# EAGLE board 9DOF-Razor-Panel-v23 (EAGLE 6.5.0), part 1 of 2
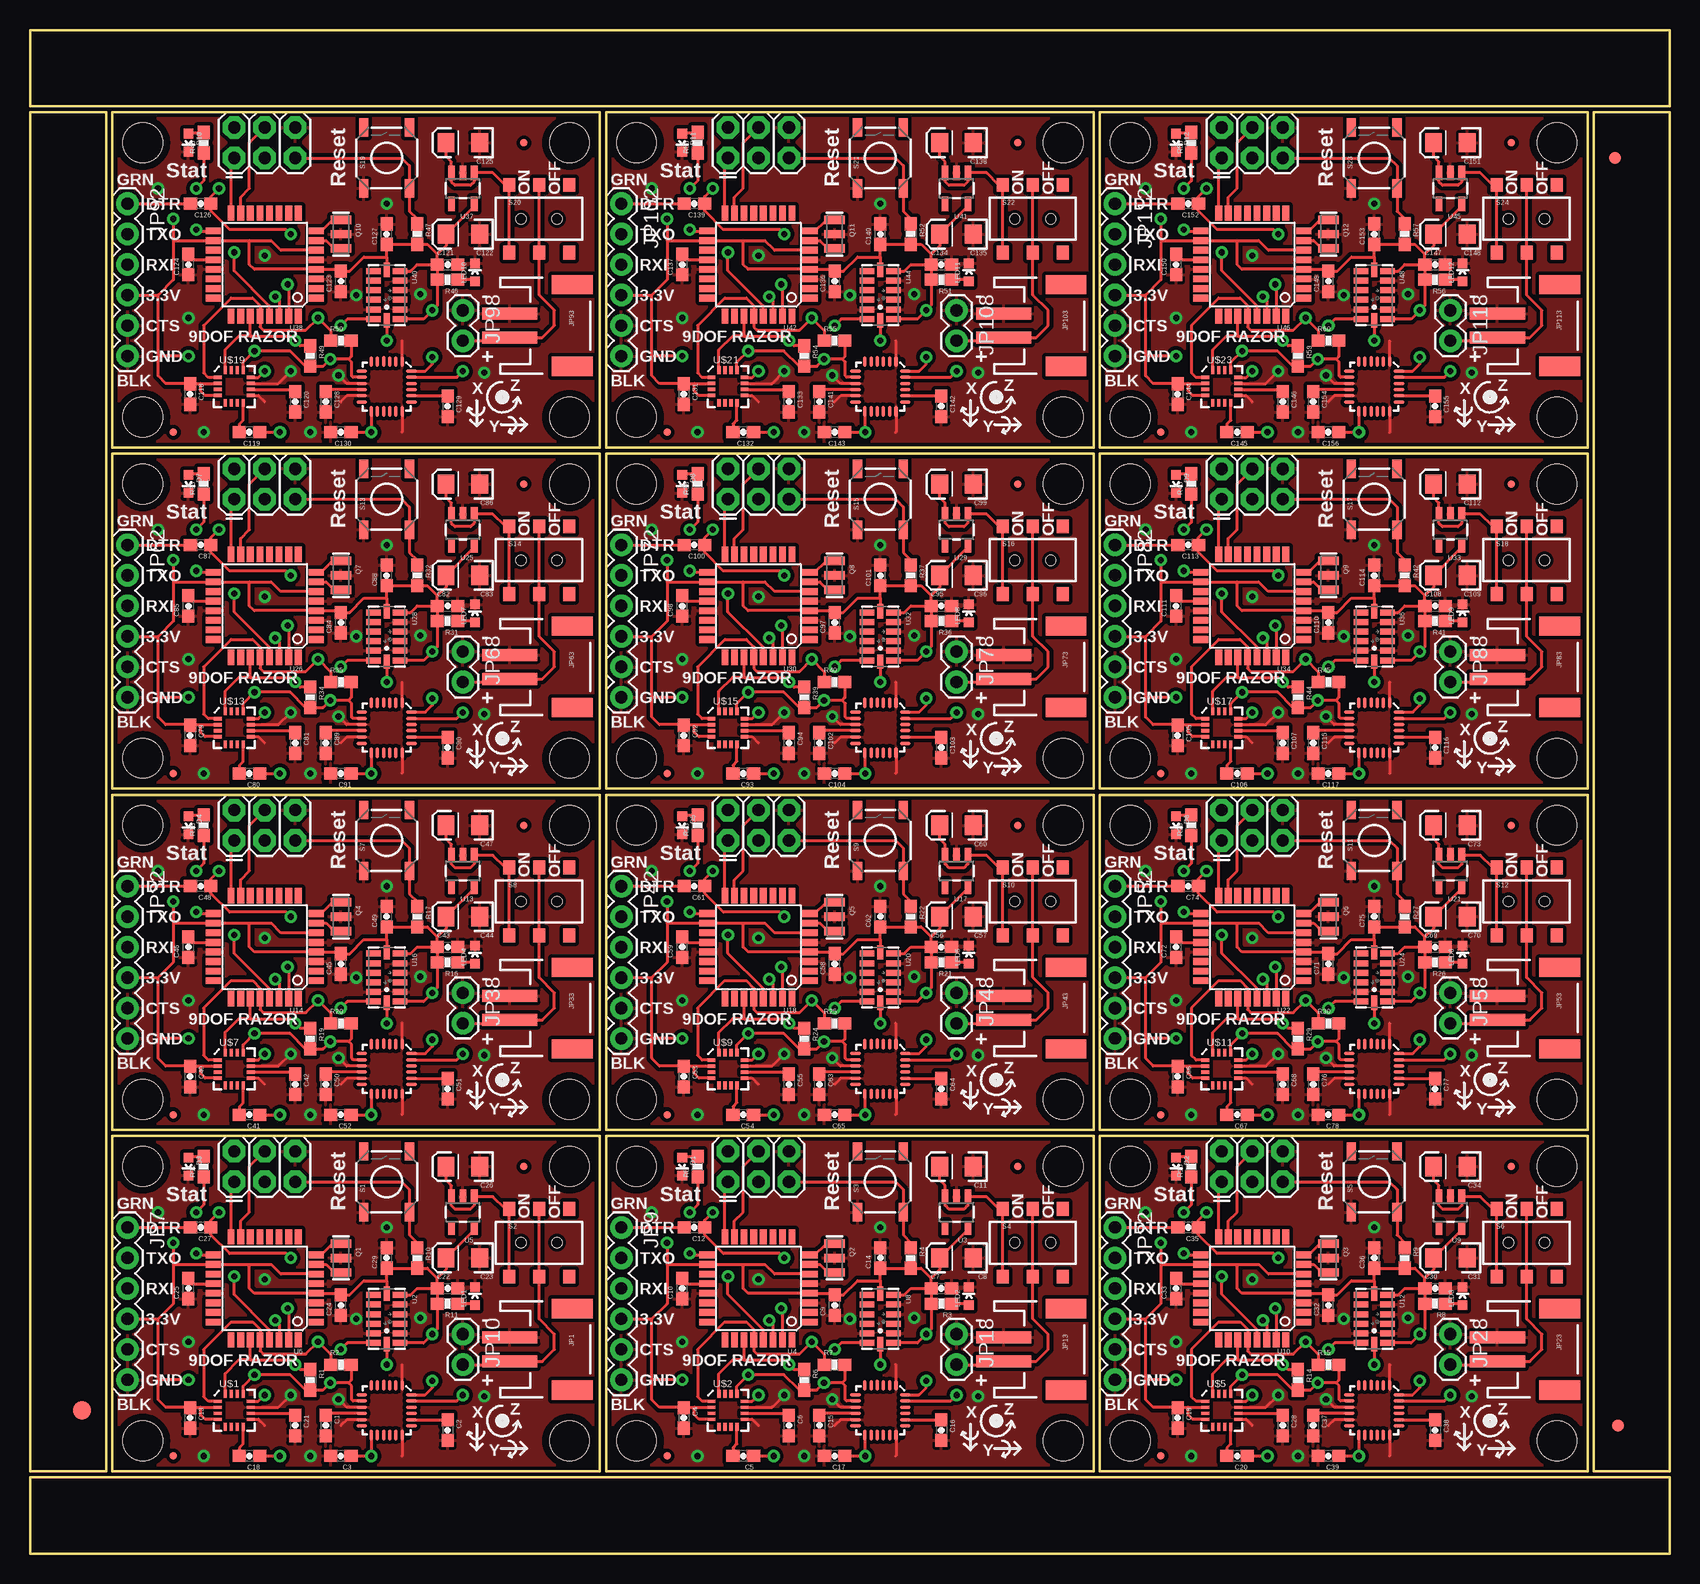
[diagram p0: board, top side]
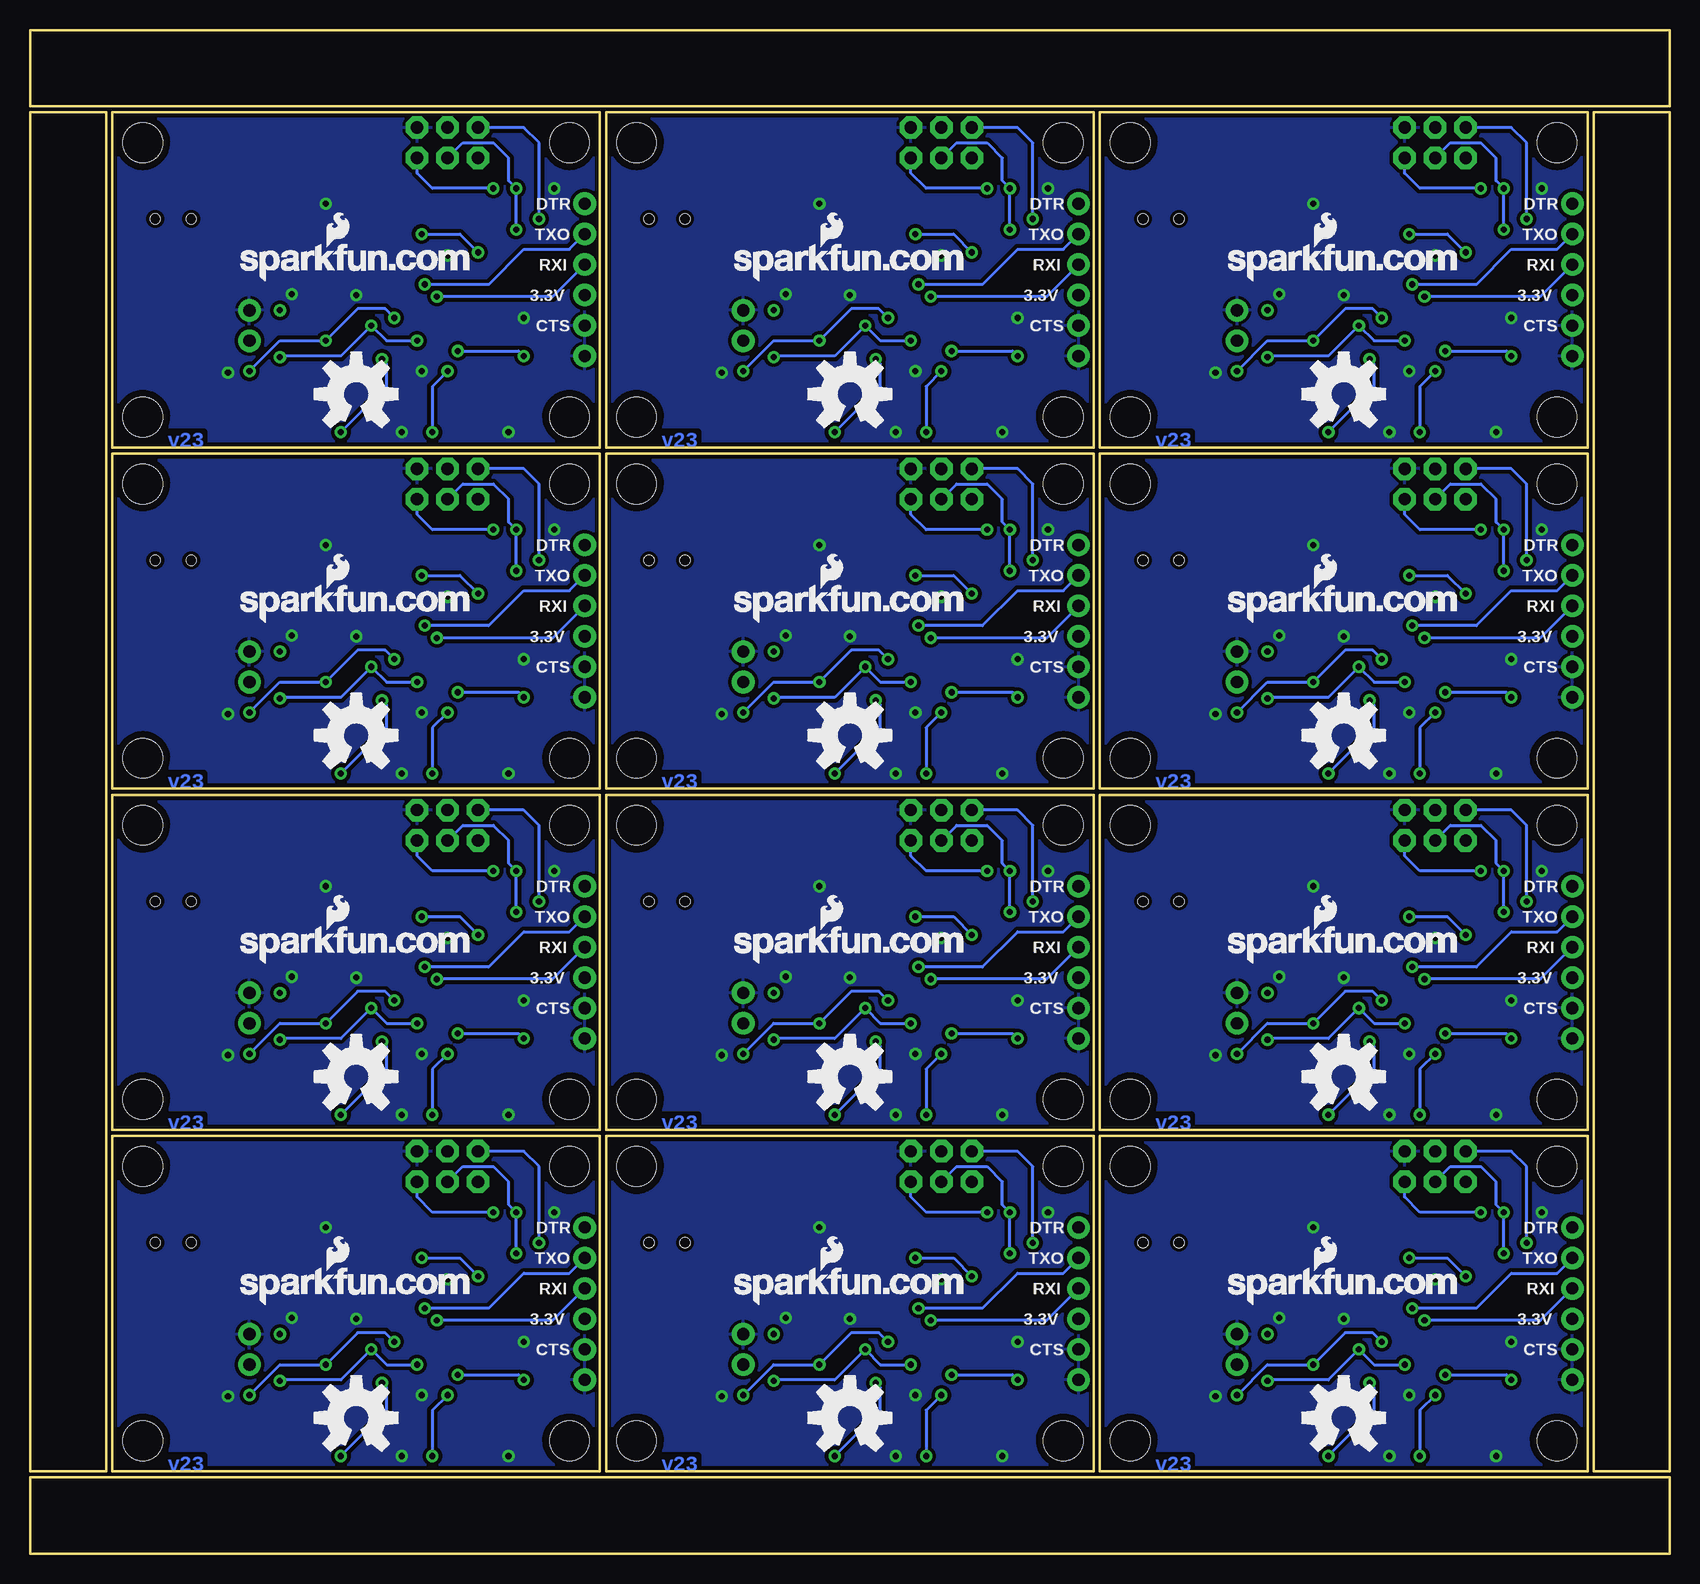
[diagram p1: board, bottom side, seen from below]

Size 136.65 x 127 mm. Coordinates in mm from the lower left corner, seen from the top.
Outline: 6.86,6.86 47.5,6.86 47.5,34.8 6.86,34.8 6.86,6.86
Outline: 48.01,6.86 88.65,6.86 88.65,34.8 48.01,34.8 48.01,6.86
Outline: 89.15,6.86 129.79,6.86 129.79,34.8 89.15,34.8 89.15,6.86
Outline: 6.86,35.31 47.5,35.31 47.5,63.25 6.86,63.25 6.86,35.31
Outline: 48.01,35.31 88.65,35.31 88.65,63.25 48.01,63.25 48.01,35.31
Outline: 89.15,35.31 129.79,35.31 129.79,63.25 89.15,63.25 89.15,35.31
Outline: 6.86,63.75 47.5,63.75 47.5,91.69 6.86,91.69 6.86,63.75
Outline: 48.01,63.75 88.65,63.75 88.65,91.69 48.01,91.69 48.01,63.75
Outline: 89.15,63.75 129.79,63.75 129.79,91.69 89.15,91.69 89.15,63.75
Outline: 6.86,92.2 47.5,92.2 47.5,120.14 6.86,120.14 6.86,92.2
Outline: 48.01,92.2 88.65,92.2 88.65,120.14 48.01,120.14 48.01,92.2
Outline: 89.15,92.2 129.79,92.2 129.79,120.14 89.15,120.14 89.15,92.2
Outline: 6.35,6.86 6.35,120.14 0,120.14 0,6.86 6.35,6.86
Outline: 0,0 136.65,0 136.65,6.35 0,6.35 0,0
Outline: 136.65,6.86 136.65,120.14 130.3,120.14 130.3,6.86 136.65,6.86
Outline: 136.65,127 0,127 0,120.65 136.65,120.65 136.65,127
Copper layers (1*16): Top 0.035mm / dielectric 1.5mm / Bottom 0.035mm
Design rules "SparkFun": minimum track width 8mil, minimum drill 20mil, track to track 8mil, track to pad 8mil, pad to pad 8mil, via to via 8mil, smd to smd 8mil, copper to edge 8mil, drill to drill 8mil, minimum pad ring 12mil, minimum via ring 10mil, stop-mask expansion 4mil, vias tented up to drill 20mil, thermal gap 10mil
Net classes: 1 vcc: width 0.254 mm
tRestrict: area 30.7,20.3 to 30.9,20.4; area 30,19.9 to 30.1,20.1; area 18.3,10.7 to 18.5,10.9; area 31.2,13.8 to 31.5,14.1; area 31.2,9.8 to 31.5,10; area 71.9,20.3 to 72,20.4; area 71.1,19.9 to 71.2,20.1; area 59.4,10.7 to 59.7,10.9; area 72.4,13.8 to 72.6,14.1; area 72.4,9.8 to 72.6,10; area 113,20.3 to 113.2,20.4; area 112.3,19.9 to 112.4,20.1; area 100.6,10.7 to 100.8,10.9; area 113.5,13.8 to 113.8,14.1; area 113.5,9.8 to 113.8,10; area 30.7,48.8 to 30.9,48.9; area 30,48.4 to 30.1,48.5; area 18.3,39.1 to 18.5,39.4; area 31.2,42.3 to 31.5,42.5; area 31.2,38.2 to 31.5,38.5; area 71.9,48.8 to 72,48.9; area 71.1,48.4 to 71.2,48.5; area 59.4,39.1 to 59.7,39.4; area 72.4,42.3 to 72.6,42.5; area 72.4,38.2 to 72.6,38.5; area 113,48.8 to 113.2,48.9; area 112.3,48.4 to 112.4,48.5; area 100.6,39.1 to 100.8,39.4; area 113.5,42.3 to 113.8,42.5; area 113.5,38.2 to 113.8,38.5; area 30.7,77.2 to 30.9,77.3; area 30,76.8 to 30.1,77; area 18.3,67.6 to 18.5,67.8; area 31.2,70.7 to 31.5,71; area 31.2,66.7 to 31.5,66.9; area 71.9,77.2 to 72,77.3; area 71.1,76.8 to 71.2,77; area 59.4,67.6 to 59.7,67.8; area 72.4,70.7 to 72.6,71; area 72.4,66.7 to 72.6,66.9; area 113,77.2 to 113.2,77.3; area 112.3,76.8 to 112.4,77; area 100.6,67.6 to 100.8,67.8; area 113.5,70.7 to 113.8,71; area 113.5,66.7 to 113.8,66.9; area 30.7,105.7 to 30.9,105.8; area 30,105.3 to 30.1,105.4; area 18.3,96 to 18.5,96.3; area 31.2,99.2 to 31.5,99.4; area 31.2,95.1 to 31.5,95.4; area 71.9,105.7 to 72,105.8; area 71.1,105.3 to 71.2,105.4; area 59.4,96 to 59.7,96.3; area 72.4,99.2 to 72.6,99.4; area 72.4,95.1 to 72.6,95.4; area 113,105.7 to 113.2,105.8; area 112.3,105.3 to 112.4,105.4; area 100.6,96 to 100.8,96.3; area 113.5,99.2 to 113.8,99.4; area 113.5,95.1 to 113.8,95.4

## Footprints (pad centres in the part's own frame; a part is rotated, then mirrored left to right if it is on the bottom)
0603-CAP = smd 1.1 x 1: 1 -0.85,0; 2 0.85,0
EIA3216 = smd 1.4 x 1.6: A 1.4,0; C -1.4,0
LED-0603 = smd 0.8 x 0.8: A 0,-0.75; C 0,0.75
FIDUCIAL-1.5X3 = smd 1.5 x 1.5: 1 0,0
FIDUCIAL-1X2 = smd 1 x 1: 1 0,0
2X3 = drill 1.016 pad 1.88 octagon: 1 0,0; 2 0,2.54; 3 2.54,0; 4 2.54,2.54; 5 5.08,0; 6 5.08,2.54
JST-2-SMD = smd 1 x 4.6: 1 -1,-3.7; 2 1,-3.7 | smd 1.6 x 3.4: NC1 -3.4,1.5; NC2 3.4,1.5
STAND-OFF = hole 3.302: 0,0
1X06 = drill 1.016 pad 1.88: 1 0,0; 2 2.54,0; 3 5.08,0; 4 7.62,0; 5 10.16,0; 6 12.7,0
1X02 = drill 1.016 pad 1.88: 1 0,0; 2 2.54,0
FIDUCIAL-1X2.5 = smd 0.635 x 0.635: 1 0,0
RESONATOR-SMD = smd 0.7 x 1.7: 1 -1.2,0; 2 0,0; 3 1.2,0
0603-RES = smd 1.1 x 1: 1 -0.85,0; 2 0.85,0
TACTILE_SWITCH_SMD = smd 1.524 x 0.762: 1 -2.54,1.905; 2 2.54,1.905; 3 -2.54,-1.905; 4 2.54,-1.905
AYZ0202 = smd 1 x 1.15: 1 -2.5,2.825; 2 0,2.825; 3 2.5,2.825; 4 -2.5,-2.825; 5 0,-2.825; 6 2.5,-2.825 | hole 0.85: 1.5,0; -1.5,0
QFN-24_ITG3200_1:1 = smd 0.889 x 0.279: 1 -2.076,1.301; 2 -2.076,0.775; 3 -2.076,0.25; 4 -2.102,-0.25; 5 -2.076,-0.775; 6 -2.076,-1.301; 13 2.076,-1.301; 14 2.076,-0.775; 15 2.076,-0.25; 16 2.076,0.25; 17 2.076,0.775; 18 2.076,1.301 | smd 0.279 x 0.889: 7 -1.301,-2.076; 8 -0.775,-2.076; 9 -0.25,-2.076; 10 0.25,-2.076; 11 0.775,-2.076; 12 1.301,-2.076; 19 1.301,2.076; 20 0.775,2.076; 21 0.25,2.076; 22 -0.25,2.076; 23 -0.775,2.076; 24 -1.301,2.076
LGA14 = smd 0.5 x 1.2: 1 2,1.1; 2 1.2,1.1; 3 0.4,1.1; 4 -0.4,1.1; 5 -1.2,1.1; 6 -2,1.1; 8 -2,-1.1; 9 -1.2,-1.1; 10 -0.4,-1.1; 11 0.4,-1.1; 12 1.2,-1.1; 13 2,-1.1 | smd 1.2 x 0.5: 7 -2.1,0; 14 2.1,0
SOT23-5 = smd 0.55 x 1.2: 1 -0.95,-1.3; 2 0,-1.3; 3 0.95,-1.3; 4 0.95,1.3; 5 -0.95,1.3
TQFP32-08 = smd 1.27 x 0.559: 1 -4.293,2.8; 2 -4.293,2; 3 -4.293,1.2; 4 -4.293,0.4; 5 -4.293,-0.4; 6 -4.293,-1.2; 7 -4.293,-2; 8 -4.293,-2.8; 17 4.293,-2.8; 18 4.293,-2; 19 4.293,-1.2; 20 4.293,-0.4; 21 4.293,0.4; 22 4.293,1.2; 23 4.293,2; 24 4.293,2.8 | smd 0.559 x 1.27: 9 -2.8,-4.293; 10 -2,-4.293; 11 -1.2,-4.293; 12 -0.4,-4.293; 13 0.4,-4.293; 14 1.2,-4.293; 15 2,-4.293; 16 2.8,-4.293; 25 2.8,4.293; 26 2,4.293; 27 1.2,4.293; 28 0.4,4.293; 29 -0.4,4.293; 30 -1.2,4.293; 31 -2,4.293; 32 -2.8,4.293
16LPCC = smd 0.65 x 0.28: 1 -1.37,0.75; 2 -1.37,0.25; 3 -1.37,-0.25; 4 -1.37,-0.75; 9 1.37,-0.75; 10 1.37,-0.25; 11 1.37,0.25; 12 1.37,0.75 | smd 0.28 x 0.65: 5 -0.75,-1.37; 6 -0.25,-1.37; 7 0.25,-1.37; 8 0.75,-1.37; 13 0.75,1.37; 14 0.25,1.37; 15 -0.25,1.37; 16 -0.75,1.37

## Placement (x,y rotation side)
C1  0.1uF  [0603-CAP]  24.64,10.67 270 top
C2  2.2nF  [0603-CAP]  34.8,10.29 270 top
C3  10nF  [0603-CAP]  25.91,8.13 180 top
C4  0.1uF  [0603-CAP]  54.48,11.3 270 top
C5  0.22uF  [0603-CAP]  59.44,8.13 180 top
C6  4.7uF  [0603-CAP]  63.25,10.67 270 top
C7  0.1uF  [0603-CAP]  75.95,22.1 0 top
C8  10uF  [EIA3216]  77.22,24.64 180 top
C9  0.1uF  [0603-CAP]  67.06,20.7 90 top
C10  0.1uF  [0603-CAP]  54.36,22.1 90 top
C11  10uF  [EIA3216]  77.22,32.26 180 top
C12  0.1uF  [0603-CAP]  55.37,27.18 180 top
C13  0.1uF  [0603-CAP]  13.34,11.3 270 top
C14  0.1uF  [0603-CAP]  70.87,24.64 90 top
C15  0.1uF  [0603-CAP]  65.79,10.67 270 top
C16  2.2nF  [0603-CAP]  75.95,10.29 270 top
C17  10nF  [0603-CAP]  67.06,8.13 180 top
C18  0.22uF  [0603-CAP]  18.29,8.13 180 top
C19  0.1uF  [0603-CAP]  95.63,11.3 270 top
C20  0.22uF  [0603-CAP]  100.58,8.13 180 top
C21  4.7uF  [0603-CAP]  22.1,10.67 270 top
C22  0.1uF  [0603-CAP]  34.8,22.1 0 top
C23  10uF  [EIA3216]  36.07,24.64 180 top
C24  0.1uF  [0603-CAP]  25.91,20.7 90 top
C25  0.1uF  [0603-CAP]  13.21,22.1 90 top
C26  10uF  [EIA3216]  36.07,32.26 180 top
C27  0.1uF  [0603-CAP]  14.22,27.18 180 top
C28  4.7uF  [0603-CAP]  104.39,10.67 270 top
C29  0.1uF  [0603-CAP]  29.72,24.64 90 top
C30  0.1uF  [0603-CAP]  117.09,22.1 0 top
C31  10uF  [EIA3216]  118.36,24.64 180 top
C32  0.1uF  [0603-CAP]  108.2,20.7 90 top
C33  0.1uF  [0603-CAP]  95.5,22.1 90 top
C34  10uF  [EIA3216]  118.36,32.26 180 top
C35  0.1uF  [0603-CAP]  96.52,27.18 180 top
C36  0.1uF  [0603-CAP]  112.01,24.64 90 top
C37  0.1uF  [0603-CAP]  106.93,10.67 270 top
C38  2.2nF  [0603-CAP]  117.09,10.29 270 top
C39  10nF  [0603-CAP]  108.2,8.13 180 top
C40  0.1uF  [0603-CAP]  13.34,39.75 270 top
C41  0.22uF  [0603-CAP]  18.29,36.58 180 top
C42  4.7uF  [0603-CAP]  22.1,39.12 270 top
C43  0.1uF  [0603-CAP]  34.8,50.55 0 top
C44  10uF  [EIA3216]  36.07,53.09 180 top
C45  0.1uF  [0603-CAP]  25.91,49.15 90 top
C46  0.1uF  [0603-CAP]  13.21,50.55 90 top
C47  10uF  [EIA3216]  36.07,60.71 180 top
C48  0.1uF  [0603-CAP]  14.22,55.63 180 top
C49  0.1uF  [0603-CAP]  29.72,53.09 90 top
C50  0.1uF  [0603-CAP]  24.64,39.12 270 top
C51  2.2nF  [0603-CAP]  34.8,38.73 270 top
C52  10nF  [0603-CAP]  25.91,36.58 180 top
C53  0.1uF  [0603-CAP]  54.48,39.75 270 top
C54  0.22uF  [0603-CAP]  59.44,36.58 180 top
C55  4.7uF  [0603-CAP]  63.25,39.12 270 top
C56  0.1uF  [0603-CAP]  75.95,50.55 0 top
C57  10uF  [EIA3216]  77.22,53.09 180 top
C58  0.1uF  [0603-CAP]  67.06,49.15 90 top
C59  0.1uF  [0603-CAP]  54.36,50.55 90 top
C60  10uF  [EIA3216]  77.22,60.71 180 top
C61  0.1uF  [0603-CAP]  55.37,55.63 180 top
C62  0.1uF  [0603-CAP]  70.87,53.09 90 top
C63  0.1uF  [0603-CAP]  65.79,39.12 270 top
C64  2.2nF  [0603-CAP]  75.95,38.73 270 top
C65  10nF  [0603-CAP]  67.06,36.58 180 top
C66  0.1uF  [0603-CAP]  95.63,39.75 270 top
C67  0.22uF  [0603-CAP]  100.58,36.58 180 top
C68  4.7uF  [0603-CAP]  104.39,39.12 270 top
C69  0.1uF  [0603-CAP]  117.09,50.55 0 top
C70  10uF  [EIA3216]  118.36,53.09 180 top
C71  0.1uF  [0603-CAP]  108.2,49.15 90 top
C72  0.1uF  [0603-CAP]  95.5,50.55 90 top
C73  10uF  [EIA3216]  118.36,60.71 180 top
C74  0.1uF  [0603-CAP]  96.52,55.63 180 top
C75  0.1uF  [0603-CAP]  112.01,53.09 90 top
C76  0.1uF  [0603-CAP]  106.93,39.12 270 top
C77  2.2nF  [0603-CAP]  117.09,38.73 270 top
C78  10nF  [0603-CAP]  108.2,36.58 180 top
C79  0.1uF  [0603-CAP]  13.34,68.2 270 top
C80  0.22uF  [0603-CAP]  18.29,65.02 180 top
C81  4.7uF  [0603-CAP]  22.1,67.56 270 top
C82  0.1uF  [0603-CAP]  34.8,78.99 0 top
C83  10uF  [EIA3216]  36.07,81.53 180 top
C84  0.1uF  [0603-CAP]  25.91,77.6 90 top
C85  0.1uF  [0603-CAP]  13.21,78.99 90 top
C86  10uF  [EIA3216]  36.07,89.15 180 top
C87  0.1uF  [0603-CAP]  14.22,84.07 180 top
C88  0.1uF  [0603-CAP]  29.72,81.53 90 top
C89  0.1uF  [0603-CAP]  24.64,67.56 270 top
C90  2.2nF  [0603-CAP]  34.8,67.18 270 top
C91  10nF  [0603-CAP]  25.91,65.02 180 top
C92  0.1uF  [0603-CAP]  54.48,68.2 270 top
C93  0.22uF  [0603-CAP]  59.44,65.02 180 top
C94  4.7uF  [0603-CAP]  63.25,67.56 270 top
C95  0.1uF  [0603-CAP]  75.95,78.99 0 top
C96  10uF  [EIA3216]  77.22,81.53 180 top
C97  0.1uF  [0603-CAP]  67.06,77.6 90 top
C98  0.1uF  [0603-CAP]  54.36,78.99 90 top
C99  10uF  [EIA3216]  77.22,89.15 180 top
C100  0.1uF  [0603-CAP]  55.37,84.07 180 top
C101  0.1uF  [0603-CAP]  70.87,81.53 90 top
C102  0.1uF  [0603-CAP]  65.79,67.56 270 top
C103  2.2nF  [0603-CAP]  75.95,67.18 270 top
C104  10nF  [0603-CAP]  67.06,65.02 180 top
C105  0.1uF  [0603-CAP]  95.63,68.2 270 top
C106  0.22uF  [0603-CAP]  100.58,65.02 180 top
C107  4.7uF  [0603-CAP]  104.39,67.56 270 top
C108  0.1uF  [0603-CAP]  117.09,78.99 0 top
C109  10uF  [EIA3216]  118.36,81.53 180 top
C110  0.1uF  [0603-CAP]  108.2,77.6 90 top
C111  0.1uF  [0603-CAP]  95.5,78.99 90 top
C112  10uF  [EIA3216]  118.36,89.15 180 top
C113  0.1uF  [0603-CAP]  96.52,84.07 180 top
C114  0.1uF  [0603-CAP]  112.01,81.53 90 top
C115  0.1uF  [0603-CAP]  106.93,67.56 270 top
C116  2.2nF  [0603-CAP]  117.09,67.18 270 top
C117  10nF  [0603-CAP]  108.2,65.02 180 top
C118  0.1uF  [0603-CAP]  13.34,96.65 270 top
C119  0.22uF  [0603-CAP]  18.29,93.47 180 top
C120  4.7uF  [0603-CAP]  22.1,96.01 270 top
C121  0.1uF  [0603-CAP]  34.8,107.44 0 top
C122  10uF  [EIA3216]  36.07,109.98 180 top
C123  0.1uF  [0603-CAP]  25.91,106.05 90 top
C124  0.1uF  [0603-CAP]  13.21,107.44 90 top
C125  10uF  [EIA3216]  36.07,117.6 180 top
C126  0.1uF  [0603-CAP]  14.22,112.52 180 top
C127  0.1uF  [0603-CAP]  29.72,109.98 90 top
C128  0.1uF  [0603-CAP]  24.64,96.01 270 top
C129  2.2nF  [0603-CAP]  34.8,95.63 270 top
C130  10nF  [0603-CAP]  25.91,93.47 180 top
C131  0.1uF  [0603-CAP]  54.48,96.65 270 top
C132  0.22uF  [0603-CAP]  59.44,93.47 180 top
C133  4.7uF  [0603-CAP]  63.25,96.01 270 top
C134  0.1uF  [0603-CAP]  75.95,107.44 0 top
C135  10uF  [EIA3216]  77.22,109.98 180 top
C136  0.1uF  [0603-CAP]  67.06,106.05 90 top
C137  0.1uF  [0603-CAP]  54.36,107.44 90 top
C138  10uF  [EIA3216]  77.22,117.6 180 top
C139  0.1uF  [0603-CAP]  55.37,112.52 180 top
C140  0.1uF  [0603-CAP]  70.87,109.98 90 top
C141  0.1uF  [0603-CAP]  65.79,96.01 270 top
C142  2.2nF  [0603-CAP]  75.95,95.63 270 top
C143  10nF  [0603-CAP]  67.06,93.47 180 top
C144  0.1uF  [0603-CAP]  95.63,96.65 270 top
C145  0.22uF  [0603-CAP]  100.58,93.47 180 top
C146  4.7uF  [0603-CAP]  104.39,96.01 270 top
C147  0.1uF  [0603-CAP]  117.09,107.44 0 top
C148  10uF  [EIA3216]  118.36,109.98 180 top
C149  0.1uF  [0603-CAP]  108.2,106.05 90 top
C150  0.1uF  [0603-CAP]  95.5,107.44 90 top
C151  10uF  [EIA3216]  118.36,117.6 180 top
C152  0.1uF  [0603-CAP]  96.52,112.52 180 top
C153  0.1uF  [0603-CAP]  112.01,109.98 90 top
C154  0.1uF  [0603-CAP]  106.93,96.01 270 top
C155  2.2nF  [0603-CAP]  117.09,95.63 270 top
C156  10nF  [0603-CAP]  108.2,93.47 180 top
D1  Green  [LED-0603]  54.36,32.26 180 top
D2  Green  [LED-0603]  95.5,32.26 180 top
D3  Green  [LED-0603]  13.21,32.26 180 top
D4  Green  [LED-0603]  13.21,60.71 180 top
D5  Green  [LED-0603]  54.36,60.71 180 top
D6  Green  [LED-0603]  95.5,60.71 180 top
D7  Green  [LED-0603]  13.21,89.15 180 top
D8  Green  [LED-0603]  54.36,89.15 180 top
D9  Green  [LED-0603]  95.5,89.15 180 top
D10  Green  [LED-0603]  13.21,117.6 180 top
D11  Green  [LED-0603]  54.36,117.6 180 top
D12  Green  [LED-0603]  95.5,117.6 180 top
E$1  [FIDUCIAL-1.5X3]  4.32,11.94 0 top
E$4  [FIDUCIAL-1X2]  132.33,10.67 0 top
E$5  [FIDUCIAL-1X2]  132.08,116.33 180 top
J1  AVR_SPI_PRG_6PTH  [2X3]  17.02,30.99 0 top
J2  AVR_SPI_PRG_6PTH  [2X3]  58.17,30.99 0 top
J3  AVR_SPI_PRG_6PTH  [2X3]  99.31,30.99 0 top
J4  AVR_SPI_PRG_6PTH  [2X3]  17.02,59.44 0 top
J5  AVR_SPI_PRG_6PTH  [2X3]  58.17,59.44 0 top
J6  AVR_SPI_PRG_6PTH  [2X3]  99.31,59.44 0 top
J7  AVR_SPI_PRG_6PTH  [2X3]  17.02,87.88 0 top
J8  AVR_SPI_PRG_6PTH  [2X3]  58.17,87.88 0 top
J9  AVR_SPI_PRG_6PTH  [2X3]  99.31,87.88 0 top
J10  AVR_SPI_PRG_6PTH  [2X3]  17.02,116.33 0 top
J11  AVR_SPI_PRG_6PTH  [2X3]  58.17,116.33 0 top
J12  AVR_SPI_PRG_6PTH  [2X3]  99.31,116.33 0 top
JP1  JST_Horizontal  [JST-2-SMD]  43.69,17.02 270 top
JP2  STAND-OFF  [STAND-OFF]  9.4,32.26 90 top
JP3  LOGO-SFENEW  [SFE-NEW-WEBLOGO]  36.83,20.7 0 bottom
JP4  STAND-OFF  [STAND-OFF]  9.4,9.4 90 top
JP5  STAND-OFF  [STAND-OFF]  44.96,32.26 90 top
JP6  STAND-OFF  [STAND-OFF]  44.96,9.4 90 top
JP7  FTDI Basic  [1X06]  8.13,27.18 270 top
JP8  LOGO-SFENEW  [SFE-NEW-WEBLOGO]  77.98,20.7 0 bottom
JP9  FTDI Basic  [1X06]  49.28,27.18 270 top
JP10  JST_Horizontal  [1X02]  36.07,18.29 270 top
JP11  FIDUCIAL1X2.5  [FIDUCIAL-1X2.5]  41.15,32.26 0 top
JP12  FIDUCIAL1X2.5  [FIDUCIAL-1X2.5]  11.94,8.13 0 top
JP13  JST_Horizontal  [JST-2-SMD]  84.84,17.02 270 top
JP14  STAND-OFF  [STAND-OFF]  50.55,32.26 90 top
JP15  STAND-OFF  [STAND-OFF]  50.55,9.4 90 top
JP16  STAND-OFF  [STAND-OFF]  86.11,32.26 90 top
JP17  STAND-OFF  [STAND-OFF]  86.11,9.4 90 top
JP18  JST_Horizontal  [1X02]  77.22,18.29 270 top
JP19  FIDUCIAL1X2.5  [FIDUCIAL-1X2.5]  82.3,32.26 0 top
JP20  FIDUCIAL1X2.5  [FIDUCIAL-1X2.5]  53.09,8.13 0 top
JP21  LOGO-SFENEW  [SFE-NEW-WEBLOGO]  119.13,20.7 0 bottom
JP22  FTDI Basic  [1X06]  90.42,27.18 270 top
JP23  JST_Horizontal  [JST-2-SMD]  125.98,17.02 270 top
JP24  STAND-OFF  [STAND-OFF]  91.69,32.26 90 top
JP25  STAND-OFF  [STAND-OFF]  91.69,9.4 90 top
JP26  STAND-OFF  [STAND-OFF]  127.25,32.26 90 top
JP27  STAND-OFF  [STAND-OFF]  127.25,9.4 90 top
JP28  JST_Horizontal  [1X02]  118.36,18.29 270 top
JP29  FIDUCIAL1X2.5  [FIDUCIAL-1X2.5]  123.44,32.26 0 top
JP30  FIDUCIAL1X2.5  [FIDUCIAL-1X2.5]  94.23,8.13 0 top
JP31  LOGO-SFENEW  [SFE-NEW-WEBLOGO]  36.83,49.15 0 bottom
JP32  FTDI Basic  [1X06]  8.13,55.63 270 top
JP33  JST_Horizontal  [JST-2-SMD]  43.69,45.47 270 top
JP34  STAND-OFF  [STAND-OFF]  9.4,60.71 90 top
JP35  STAND-OFF  [STAND-OFF]  9.4,37.85 90 top
JP36  STAND-OFF  [STAND-OFF]  44.96,60.71 90 top
JP37  STAND-OFF  [STAND-OFF]  44.96,37.85 90 top
JP38  JST_Horizontal  [1X02]  36.07,46.74 270 top
JP39  FIDUCIAL1X2.5  [FIDUCIAL-1X2.5]  41.15,60.71 0 top
JP40  FIDUCIAL1X2.5  [FIDUCIAL-1X2.5]  11.94,36.58 0 top
JP41  LOGO-SFENEW  [SFE-NEW-WEBLOGO]  77.98,49.15 0 bottom
JP42  FTDI Basic  [1X06]  49.28,55.63 270 top
JP43  JST_Horizontal  [JST-2-SMD]  84.84,45.47 270 top
JP44  STAND-OFF  [STAND-OFF]  50.55,60.71 90 top
JP45  STAND-OFF  [STAND-OFF]  50.55,37.85 90 top
JP46  STAND-OFF  [STAND-OFF]  86.11,60.71 90 top
JP47  STAND-OFF  [STAND-OFF]  86.11,37.85 90 top
JP48  JST_Horizontal  [1X02]  77.22,46.74 270 top
JP49  FIDUCIAL1X2.5  [FIDUCIAL-1X2.5]  82.3,60.71 0 top
JP50  FIDUCIAL1X2.5  [FIDUCIAL-1X2.5]  53.09,36.58 0 top
JP51  LOGO-SFENEW  [SFE-NEW-WEBLOGO]  119.13,49.15 0 bottom
JP52  FTDI Basic  [1X06]  90.42,55.63 270 top
JP53  JST_Horizontal  [JST-2-SMD]  125.98,45.47 270 top
JP54  STAND-OFF  [STAND-OFF]  91.69,60.71 90 top
JP55  STAND-OFF  [STAND-OFF]  91.69,37.85 90 top
JP56  STAND-OFF  [STAND-OFF]  127.25,60.71 90 top
JP57  STAND-OFF  [STAND-OFF]  127.25,37.85 90 top
JP58  JST_Horizontal  [1X02]  118.36,46.74 270 top
JP59  FIDUCIAL1X2.5  [FIDUCIAL-1X2.5]  123.44,60.71 0 top
JP60  FIDUCIAL1X2.5  [FIDUCIAL-1X2.5]  94.23,36.58 0 top
JP61  LOGO-SFENEW  [SFE-NEW-WEBLOGO]  36.83,77.6 0 bottom
JP62  FTDI Basic  [1X06]  8.13,84.07 270 top
JP63  JST_Horizontal  [JST-2-SMD]  43.69,73.91 270 top
JP64  STAND-OFF  [STAND-OFF]  9.4,89.15 90 top
JP65  STAND-OFF  [STAND-OFF]  9.4,66.29 90 top
JP66  STAND-OFF  [STAND-OFF]  44.96,89.15 90 top
JP67  STAND-OFF  [STAND-OFF]  44.96,66.29 90 top
JP68  JST_Horizontal  [1X02]  36.07,75.18 270 top
JP69  FIDUCIAL1X2.5  [FIDUCIAL-1X2.5]  41.15,89.15 0 top
JP70  FIDUCIAL1X2.5  [FIDUCIAL-1X2.5]  11.94,65.02 0 top
JP71  LOGO-SFENEW  [SFE-NEW-WEBLOGO]  77.98,77.6 0 bottom
JP72  FTDI Basic  [1X06]  49.28,84.07 270 top
JP73  JST_Horizontal  [JST-2-SMD]  84.84,73.91 270 top
JP74  STAND-OFF  [STAND-OFF]  50.55,89.15 90 top
JP75  STAND-OFF  [STAND-OFF]  50.55,66.29 90 top
JP76  STAND-OFF  [STAND-OFF]  86.11,89.15 90 top
JP77  STAND-OFF  [STAND-OFF]  86.11,66.29 90 top
JP78  JST_Horizontal  [1X02]  77.22,75.18 270 top
JP79  FIDUCIAL1X2.5  [FIDUCIAL-1X2.5]  82.3,89.15 0 top
JP80  FIDUCIAL1X2.5  [FIDUCIAL-1X2.5]  53.09,65.02 0 top
JP81  LOGO-SFENEW  [SFE-NEW-WEBLOGO]  119.13,77.6 0 bottom
JP82  FTDI Basic  [1X06]  90.42,84.07 270 top
JP83  JST_Horizontal  [JST-2-SMD]  125.98,73.91 270 top
JP84  STAND-OFF  [STAND-OFF]  91.69,89.15 90 top
JP85  STAND-OFF  [STAND-OFF]  91.69,66.29 90 top
JP86  STAND-OFF  [STAND-OFF]  127.25,89.15 90 top
JP87  STAND-OFF  [STAND-OFF]  127.25,66.29 90 top
JP88  JST_Horizontal  [1X02]  118.36,75.18 270 top
JP89  FIDUCIAL1X2.5  [FIDUCIAL-1X2.5]  123.44,89.15 0 top
JP90  FIDUCIAL1X2.5  [FIDUCIAL-1X2.5]  94.23,65.02 0 top
JP91  LOGO-SFENEW  [SFE-NEW-WEBLOGO]  36.83,106.05 0 bottom
JP92  FTDI Basic  [1X06]  8.13,112.52 270 top
JP93  JST_Horizontal  [JST-2-SMD]  43.69,102.36 270 top
JP94  STAND-OFF  [STAND-OFF]  9.4,117.6 90 top
JP95  STAND-OFF  [STAND-OFF]  9.4,94.74 90 top
JP96  STAND-OFF  [STAND-OFF]  44.96,117.6 90 top
JP97  STAND-OFF  [STAND-OFF]  44.96,94.74 90 top
JP98  JST_Horizontal  [1X02]  36.07,103.63 270 top
JP99  FIDUCIAL1X2.5  [FIDUCIAL-1X2.5]  41.15,117.6 0 top
JP100  FIDUCIAL1X2.5  [FIDUCIAL-1X2.5]  11.94,93.47 0 top
JP101  LOGO-SFENEW  [SFE-NEW-WEBLOGO]  77.98,106.05 0 bottom
JP102  FTDI Basic  [1X06]  49.28,112.52 270 top
JP103  JST_Horizontal  [JST-2-SMD]  84.84,102.36 270 top
JP104  STAND-OFF  [STAND-OFF]  50.55,117.6 90 top
JP105  STAND-OFF  [STAND-OFF]  50.55,94.74 90 top
JP106  STAND-OFF  [STAND-OFF]  86.11,117.6 90 top
JP107  STAND-OFF  [STAND-OFF]  86.11,94.74 90 top
JP108  JST_Horizontal  [1X02]  77.22,103.63 270 top
JP109  FIDUCIAL1X2.5  [FIDUCIAL-1X2.5]  82.3,117.6 0 top
JP110  FIDUCIAL1X2.5  [FIDUCIAL-1X2.5]  53.09,93.47 0 top
JP111  LOGO-SFENEW  [SFE-NEW-WEBLOGO]  119.13,106.05 0 bottom
JP112  FTDI Basic  [1X06]  90.42,112.52 270 top
JP113  JST_Horizontal  [JST-2-SMD]  125.98,102.36 270 top
JP114  STAND-OFF  [STAND-OFF]  91.69,117.6 90 top
JP115  STAND-OFF  [STAND-OFF]  91.69,94.74 90 top
JP116  STAND-OFF  [STAND-OFF]  127.25,117.6 90 top
JP117  STAND-OFF  [STAND-OFF]  127.25,94.74 90 top
JP118  JST_Horizontal  [1X02]  118.36,103.63 270 top
JP119  FIDUCIAL1X2.5  [FIDUCIAL-1X2.5]  123.44,117.6 0 top
JP120  FIDUCIAL1X2.5  [FIDUCIAL-1X2.5]  94.23,93.47 0 top
LED1  Red  [LED-0603]  37.08,21.46 0 top
LED2  Red  [LED-0603]  78.23,21.46 0 top
LED3  Red  [LED-0603]  119.38,21.46 0 top
LED4  Red  [LED-0603]  37.08,49.91 0 top
LED5  Red  [LED-0603]  78.23,49.91 0 top
LED6  Red  [LED-0603]  119.38,49.91 0 top
LED7  Red  [LED-0603]  37.08,78.36 0 top
LED8  Red  [LED-0603]  78.23,78.36 0 top
LED9  Red  [LED-0603]  119.38,78.36 0 top
LED10  Red  [LED-0603]  37.08,106.81 0 top
LED11  Red  [LED-0603]  78.23,106.81 0 top
LED12  Red  [LED-0603]  119.38,106.81 0 top
Q1  8MHz  [RESONATOR-SMD]  25.91,24.64 270 top
Q2  8MHz  [RESONATOR-SMD]  67.06,24.64 270 top
Q3  8MHz  [RESONATOR-SMD]  108.2,24.64 270 top
Q4  8MHz  [RESONATOR-SMD]  25.91,53.09 270 top
Q5  8MHz  [RESONATOR-SMD]  67.06,53.09 270 top
Q6  8MHz  [RESONATOR-SMD]  108.2,53.09 270 top
Q7  8MHz  [RESONATOR-SMD]  25.91,81.53 270 top
Q8  8MHz  [RESONATOR-SMD]  67.06,81.53 270 top
Q9  8MHz  [RESONATOR-SMD]  108.2,81.53 270 top
Q10  8MHz  [RESONATOR-SMD]  25.91,109.98 270 top
Q11  8MHz  [RESONATOR-SMD]  67.06,109.98 270 top
Q12  8MHz  [RESONATOR-SMD]  108.2,109.98 270 top
R1  4.7k  [0603-RES]  23.37,14.48 270 top
R2  4.7K  [0603-RES]  25.91,15.75 0 top
R3  10K  [0603-RES]  75.95,20.83 180 top
R4  10K  [0603-RES]  73.41,24.64 270 top
R5  330  [0603-RES]  55.63,32.26 90 top
R6  4.7k  [0603-RES]  64.52,14.48 270 top
R7  4.7K  [0603-RES]  67.06,15.75 0 top
R8  10K  [0603-RES]  117.09,20.83 180 top
R9  10K  [0603-RES]  114.55,24.64 270 top
R10  10K  [0603-RES]  32.26,24.64 270 top
R11  10K  [0603-RES]  34.8,20.83 180 top
R12  330  [0603-RES]  14.48,32.26 90 top
R13  330  [0603-RES]  96.77,32.26 90 top
R14  4.7k  [0603-RES]  105.66,14.48 270 top
R15  4.7K  [0603-RES]  108.2,15.75 0 top
R16  10K  [0603-RES]  34.8,49.28 180 top
R17  10K  [0603-RES]  32.26,53.09 270 top
R18  330  [0603-RES]  14.48,60.71 90 top
R19  4.7k  [0603-RES]  23.37,42.93 270 top
R20  4.7K  [0603-RES]  25.91,44.2 0 top
R21  10K  [0603-RES]  75.95,49.28 180 top
R22  10K  [0603-RES]  73.41,53.09 270 top
R23  330  [0603-RES]  55.63,60.71 90 top
R24  4.7k  [0603-RES]  64.52,42.93 270 top
R25  4.7K  [0603-RES]  67.06,44.2 0 top
R26  10K  [0603-RES]  117.09,49.28 180 top
R27  10K  [0603-RES]  114.55,53.09 270 top
R28  330  [0603-RES]  96.77,60.71 90 top
R29  4.7k  [0603-RES]  105.66,42.93 270 top
R30  4.7K  [0603-RES]  108.2,44.2 0 top
R31  10K  [0603-RES]  34.8,77.72 180 top
R32  10K  [0603-RES]  32.26,81.53 270 top
R33  330  [0603-RES]  14.48,89.15 90 top
R34  4.7k  [0603-RES]  23.37,71.37 270 top
R35  4.7K  [0603-RES]  25.91,72.64 0 top
R36  10K  [0603-RES]  75.95,77.72 180 top
R37  10K  [0603-RES]  73.41,81.53 270 top
R38  330  [0603-RES]  55.63,89.15 90 top
R39  4.7k  [0603-RES]  64.52,71.37 270 top
R40  4.7K  [0603-RES]  67.06,72.64 0 top
R41  10K  [0603-RES]  117.09,77.72 180 top
R42  10K  [0603-RES]  114.55,81.53 270 top
R43  330  [0603-RES]  96.77,89.15 90 top
R44  4.7k  [0603-RES]  105.66,71.37 270 top
R45  4.7K  [0603-RES]  108.2,72.64 0 top
R46  10K  [0603-RES]  34.8,106.17 180 top
R47  10K  [0603-RES]  32.26,109.98 270 top
R48  330  [0603-RES]  14.48,117.6 90 top
R49  4.7k  [0603-RES]  23.37,99.82 270 top
R50  4.7K  [0603-RES]  25.91,101.09 0 top
R51  10K  [0603-RES]  75.95,106.17 180 top
R52  10K  [0603-RES]  73.41,109.98 270 top
R53  330  [0603-RES]  55.63,117.6 90 top
R54  4.7k  [0603-RES]  64.52,99.82 270 top
R55  4.7K  [0603-RES]  67.06,101.09 0 top
R56  10K  [0603-RES]  117.09,106.17 180 top
R57  10K  [0603-RES]  114.55,109.98 270 top
R58  330  [0603-RES]  96.77,117.6 90 top
R59  4.7k  [0603-RES]  105.66,99.82 270 top
R60  4.7K  [0603-RES]  108.2,101.09 0 top
S1  Reset  [TACTILE_SWITCH_SMD]  29.72,30.99 90 top
S2  Power  [AYZ0202]  42.42,25.91 0 top
S3  Reset  [TACTILE_SWITCH_SMD]  70.87,30.99 90 top
S4  Power  [AYZ0202]  83.57,25.91 0 top
S5  Reset  [TACTILE_SWITCH_SMD]  112.01,30.99 90 top
S6  Power  [AYZ0202]  124.71,25.91 0 top
S7  Reset  [TACTILE_SWITCH_SMD]  29.72,59.44 90 top
S8  Power  [AYZ0202]  42.42,54.36 0 top
S9  Reset  [TACTILE_SWITCH_SMD]  70.87,59.44 90 top
S10  Power  [AYZ0202]  83.57,54.36 0 top
S11  Reset  [TACTILE_SWITCH_SMD]  112.01,59.44 90 top
S12  Power  [AYZ0202]  124.71,54.36 0 top
S13  Reset  [TACTILE_SWITCH_SMD]  29.72,87.88 90 top
S14  Power  [AYZ0202]  42.42,82.8 0 top
S15  Reset  [TACTILE_SWITCH_SMD]  70.87,87.88 90 top
S16  Power  [AYZ0202]  83.57,82.8 0 top
S17  Reset  [TACTILE_SWITCH_SMD]  112.01,87.88 90 top
S18  Power  [AYZ0202]  124.71,82.8 0 top
S19  Reset  [TACTILE_SWITCH_SMD]  29.72,116.33 90 top
S20  Power  [AYZ0202]  42.42,111.25 0 top
S21  Reset  [TACTILE_SWITCH_SMD]  70.87,116.33 90 top
S22  Power  [AYZ0202]  83.57,111.25 0 top
S23  Reset  [TACTILE_SWITCH_SMD]  112.01,116.33 90 top
S24  Power  [AYZ0202]  124.71,111.25 0 top
U1  ITG-32001:1  [QFN-24_ITG3200_1:1]  29.72,11.94 270 top
U2  ADXL3451:1  [LGA14]  29.72,19.56 270 top
U3  3.3V  [SOT23-5]  77.22,28.45 180 top
U4  ATMEGA328  [TQFP32-08]  60.71,22.1 180 top
U5  3.3V  [SOT23-5]  36.07,28.45 180 top
U6  ATMEGA328  [TQFP32-08]  19.56,22.1 180 top
U7  ITG-32001:1  [QFN-24_ITG3200_1:1]  70.87,11.94 270 top
U8  ADXL3451:1  [LGA14]  70.87,19.56 270 top
U9  3.3V  [SOT23-5]  118.36,28.45 180 top
U10  ATMEGA328  [TQFP32-08]  101.85,22.1 180 top
U11  ITG-32001:1  [QFN-24_ITG3200_1:1]  112.01,11.94 270 top
U12  ADXL3451:1  [LGA14]  112.01,19.56 270 top
U13  3.3V  [SOT23-5]  36.07,56.9 180 top
U14  ATMEGA328  [TQFP32-08]  19.56,50.55 180 top
U15  ITG-32001:1  [QFN-24_ITG3200_1:1]  29.72,40.39 270 top
U16  ADXL3451:1  [LGA14]  29.72,48.01 270 top
U17  3.3V  [SOT23-5]  77.22,56.9 180 top
U18  ATMEGA328  [TQFP32-08]  60.71,50.55 180 top
U19  ITG-32001:1  [QFN-24_ITG3200_1:1]  70.87,40.39 270 top
U20  ADXL3451:1  [LGA14]  70.87,48.01 270 top
U21  3.3V  [SOT23-5]  118.36,56.9 180 top
U22  ATMEGA328  [TQFP32-08]  101.85,50.55 180 top
U23  ITG-32001:1  [QFN-24_ITG3200_1:1]  112.01,40.39 270 top
U24  ADXL3451:1  [LGA14]  112.01,48.01 270 top
U25  3.3V  [SOT23-5]  36.07,85.34 180 top
U26  ATMEGA328  [TQFP32-08]  19.56,78.99 180 top
U27  ITG-32001:1  [QFN-24_ITG3200_1:1]  29.72,68.83 270 top
U28  ADXL3451:1  [LGA14]  29.72,76.45 270 top
U29  3.3V  [SOT23-5]  77.22,85.34 180 top
U30  ATMEGA328  [TQFP32-08]  60.71,78.99 180 top
U31  ITG-32001:1  [QFN-24_ITG3200_1:1]  70.87,68.83 270 top
U32  ADXL3451:1  [LGA14]  70.87,76.45 270 top
U33  3.3V  [SOT23-5]  118.36,85.34 180 top
U34  ATMEGA328  [TQFP32-08]  101.85,78.99 180 top
U35  ITG-32001:1  [QFN-24_ITG3200_1:1]  112.01,68.83 270 top
U36  ADXL3451:1  [LGA14]  112.01,76.45 270 top
U37  3.3V  [SOT23-5]  36.07,113.79 180 top
U38  ATMEGA328  [TQFP32-08]  19.56,107.44 180 top
U39  ITG-32001:1  [QFN-24_ITG3200_1:1]  29.72,97.28 270 top
U40  ADXL3451:1  [LGA14]  29.72,104.9 270 top
U41  3.3V  [SOT23-5]  77.22,113.79 180 top
U42  ATMEGA328  [TQFP32-08]  60.71,107.44 180 top
U43  ITG-32001:1  [QFN-24_ITG3200_1:1]  70.87,97.28 270 top
U44  ADXL3451:1  [LGA14]  70.87,104.9 270 top
U45  3.3V  [SOT23-5]  118.36,113.79 180 top
U46  ATMEGA328  [TQFP32-08]  101.85,107.44 180 top
U47  ITG-32001:1  [QFN-24_ITG3200_1:1]  112.01,97.28 270 top
U48  ADXL3451:1  [LGA14]  112.01,104.9 270 top
U$1  HMC5883LSMD  [16LPCC]  17.02,11.94 0 top
U$2  HMC5883LSMD  [16LPCC]  58.17,11.94 0 top
U$3  OSHW-LOGOL  [OSHW-LOGO-L]  68.33,11.3 0 bottom
U$4  OSHW-LOGOL  [OSHW-LOGO-L]  27.18,11.3 0 bottom
U$5  HMC5883LSMD  [16LPCC]  99.31,11.94 0 top
U$6  OSHW-LOGOL  [OSHW-LOGO-L]  109.47,11.3 0 bottom
U$7  HMC5883LSMD  [16LPCC]  17.02,40.39 0 top
U$8  OSHW-LOGOL  [OSHW-LOGO-L]  27.18,39.75 0 bottom
U$9  HMC5883LSMD  [16LPCC]  58.17,40.39 0 top
U$10  OSHW-LOGOL  [OSHW-LOGO-L]  68.33,39.75 0 bottom
U$11  HMC5883LSMD  [16LPCC]  99.31,40.39 0 top
U$12  OSHW-LOGOL  [OSHW-LOGO-L]  109.47,39.75 0 bottom
U$13  HMC5883LSMD  [16LPCC]  17.02,68.83 0 top
U$14  OSHW-LOGOL  [OSHW-LOGO-L]  27.18,68.2 0 bottom
U$15  HMC5883LSMD  [16LPCC]  58.17,68.83 0 top
U$16  OSHW-LOGOL  [OSHW-LOGO-L]  68.33,68.2 0 bottom
U$17  HMC5883LSMD  [16LPCC]  99.31,68.83 0 top
U$18  OSHW-LOGOL  [OSHW-LOGO-L]  109.47,68.2 0 bottom
U$19  HMC5883LSMD  [16LPCC]  17.02,97.28 0 top
U$20  OSHW-LOGOL  [OSHW-LOGO-L]  27.18,96.65 0 bottom
U$21  HMC5883LSMD  [16LPCC]  58.17,97.28 0 top
U$22  OSHW-LOGOL  [OSHW-LOGO-L]  68.33,96.65 0 bottom
U$23  HMC5883LSMD  [16LPCC]  99.31,97.28 0 top
U$24  OSHW-LOGOL  [OSHW-LOGO-L]  109.47,96.65 0 bottom

## Library data of the parts
C1-C156 D1-D12 J1-J12 JP1-JP10 JP13-JP18 JP21-JP28 JP31-JP38 JP41-JP48 JP51-JP58 JP61-JP68 JP71-JP78 JP81-JP88 JP91-JP98 JP101-JP108 JP111-JP118 LED1-LED12 Q1-Q12 R1-R60 S1-S24 U3-U6 U9 U10 U13 U14 U17 U18 U21 U22 U25 U26 U29 U30 U33 U34 U37 U38 U41 U42 U45 U46 U$1-U$24 = SparkFun
E$1 E$4 E$5 = SparkFun-Aesthetics
JP11 JP12 JP19 JP20 JP29 JP30 JP39 JP40 JP49 JP50 JP59 JP60 JP69 JP70 JP79 JP80 JP89 JP90 JP99 JP100 JP109 JP110 JP119 JP120 = abes
U1 U2 U7 U8 U11 U12 U15 U16 U19 U20 U23 U24 U27 U28 U31 U32 U35 U36 U39 U40 U43 U44 U47 U48 = Testing

## Nets
3.3V: C3.1 C13.1 C22.1 C23.A C24.2 C29.1 J1.2 JP7.4 R1.2 R2.2 R10.2 R11.2 U1.8 U1.13 U2.1 U2.6 U2.7 U5.5 U6.4 U6.6 U6.18 U$1.2 U$1.4 U$1.13
3.3V1: C4.1 C7.1 C8.A C9.2 C14.1 C17.1 J2.2 JP9.4 R3.2 R4.2 R6.2 R7.2 U3.5 U4.4 U4.6 U4.18 U7.8 U7.13 U8.1 U8.6 U8.7 U$2.2 U$2.4 U$2.13
3.3V2: C19.1 C30.1 C31.A C32.2 C36.1 C39.1 J3.2 JP22.4 R8.2 R9.2 R14.2 R15.2 U9.5 U10.4 U10.6 U10.18 U11.8 U11.13 U12.1 U12.6 U12.7 U$5.2 U$5.4 U$5.13
3.3V3: C40.1 C43.1 C44.A C45.2 C49.1 C52.1 J4.2 JP32.4 R16.2 R17.2 R19.2 R20.2 U13.5 U14.4 U14.6 U14.18 U15.8 U15.13 U16.1 U16.6 U16.7 U$7.2 U$7.4 U$7.13
3.3V4: C53.1 C56.1 C57.A C58.2 C62.1 C65.1 J5.2 JP42.4 R21.2 R22.2 R24.2 R25.2 U17.5 U18.4 U18.6 U18.18 U19.8 U19.13 U20.1 U20.6 U20.7 U$9.2 U$9.4 U$9.13
3.3V5: C66.1 C69.1 C70.A C71.2 C75.1 C78.1 J6.2 JP52.4 R26.2 R27.2 R29.2 R30.2 U21.5 U22.4 U22.6 U22.18 U23.8 U23.13 U24.1 U24.6 U24.7 U$11.2 U$11.4 U$11.13
3.3V6: C79.1 C82.1 C83.A C84.2 C88.1 C91.1 J7.2 JP62.4 R31.2 R32.2 R34.2 R35.2 U25.5 U26.4 U26.6 U26.18 U27.8 U27.13 U28.1 U28.6 U28.7 U$13.2 U$13.4 U$13.13
3.3V7: C92.1 C95.1 C96.A C97.2 C101.1 C104.1 J8.2 JP72.4 R36.2 R37.2 R39.2 R40.2 U29.5 U30.4 U30.6 U30.18 U31.8 U31.13 U32.1 U32.6 U32.7 U$15.2 U$15.4 U$15.13
3.3V8: C105.1 C108.1 C109.A C110.2 C114.1 C117.1 J9.2 JP82.4 R41.2 R42.2 R44.2 R45.2 U33.5 U34.4 U34.6 U34.18 U35.8 U35.13 U36.1 U36.6 U36.7 U$17.2 U$17.4 U$17.13
3.3V9: C118.1 C121.1 C122.A C123.2 C127.1 C130.1 J10.2 JP92.4 R46.2 R47.2 R49.2 R50.2 U37.5 U38.4 U38.6 U38.18 U39.8 U39.13 U40.1 U40.6 U40.7 U$19.2 U$19.4 U$19.13
3.3V10: C131.1 C134.1 C135.A C136.2 C140.1 C143.1 J11.2 JP102.4 R51.2 R52.2 R54.2 R55.2 U41.5 U42.4 U42.6 U42.18 U43.8 U43.13 U44.1 U44.6 U44.7 U$21.2 U$21.4 U$21.13
3.3V11: C144.1 C147.1 C148.A C149.2 C153.1 C156.1 J12.2 JP112.4 R56.2 R57.2 R59.2 R60.2 U45.5 U46.4 U46.6 U46.18 U47.8 U47.13 U48.1 U48.6 U48.7 U$23.2 U$23.4 U$23.13
AREF: C25.2 U6.20
AREF1: C10.2 U4.20
AREF2: C33.2 U10.20
AREF3: C46.2 U14.20
AREF4: C59.2 U18.20
AREF5: C72.2 U22.20
AREF6: C85.2 U26.20
AREF7: C98.2 U30.20
AREF8: C111.2 U34.20
AREF9: C124.2 U38.20
AREF10: C137.2 U42.20
AREF11: C150.2 U46.20
DTR: C27.2 JP7.1
DTR1: C12.2 JP9.1
DTR2: C35.2 JP22.1
DTR3: C48.2 JP32.1
DTR4: C61.2 JP42.1
DTR5: C74.2 JP52.1
DTR6: C87.2 JP62.1
DTR7: C100.2 JP72.1
DTR8: C113.2 JP82.1
DTR9: C126.2 JP92.1
DTR10: C139.2 JP102.1
DTR11: C152.2 JP112.1
GND: C1.2 C2.2 C3.2 C13.2 C21.2 C22.2 C23.C C24.1 C25.1 C26.C C29.2 D3.C J1.6 JP1.1 JP7.5 JP7.6 JP10.1 LED1.C Q1.2 S1.1 U1.1 U1.9 U1.11 U1.18 U2.2 U2.4 U2.5 U2.12 U5.2 U6.3 U6.5 U6.21 U$1.9 U$1.11
GND1: C4.2 C6.2 C7.2 C8.C C9.1 C10.1 C11.C C14.2 C15.2 C16.2 C17.2 D1.C J2.6 JP9.5 JP9.6 JP13.1 JP18.1 LED2.C Q2.2 S3.1 U3.2 U4.3 U4.5 U4.21 U7.1 U7.9 U7.11 U7.18 U8.2 U8.4 U8.5 U8.12 U$2.9 U$2.11
GND2: C19.2 C28.2 C30.2 C31.C C32.1 C33.1 C34.C C36.2 C37.2 C38.2 C39.2 D2.C J3.6 JP22.5 JP22.6 JP23.1 JP28.1 LED3.C Q3.2 S5.1 U9.2 U10.3 U10.5 U10.21 U11.1 U11.9 U11.11 U11.18 U12.2 U12.4 U12.5 U12.12 U$5.9 U$5.11
GND3: C40.2 C42.2 C43.2 C44.C C45.1 C46.1 C47.C C49.2 C50.2 C51.2 C52.2 D4.C J4.6 JP32.5 JP32.6 JP33.1 JP38.1 LED4.C Q4.2 S7.1 U13.2 U14.3 U14.5 U14.21 U15.1 U15.9 U15.11 U15.18 U16.2 U16.4 U16.5 U16.12 U$7.9 U$7.11
GND4: C53.2 C55.2 C56.2 C57.C C58.1 C59.1 C60.C C62.2 C63.2 C64.2 C65.2 D5.C J5.6 JP42.5 JP42.6 JP43.1 JP48.1 LED5.C Q5.2 S9.1 U17.2 U18.3 U18.5 U18.21 U19.1 U19.9 U19.11 U19.18 U20.2 U20.4 U20.5 U20.12 U$9.9 U$9.11
GND5: C66.2 C68.2 C69.2 C70.C C71.1 C72.1 C73.C C75.2 C76.2 C77.2 C78.2 D6.C J6.6 JP52.5 JP52.6 JP53.1 JP58.1 LED6.C Q6.2 S11.1 U21.2 U22.3 U22.5 U22.21 U23.1 U23.9 U23.11 U23.18 U24.2 U24.4 U24.5 U24.12 U$11.9 U$11.11
GND6: C79.2 C81.2 C82.2 C83.C C84.1 C85.1 C86.C C88.2 C89.2 C90.2 C91.2 D7.C J7.6 JP62.5 JP62.6 JP63.1 JP68.1 LED7.C Q7.2 S13.1 U25.2 U26.3 U26.5 U26.21 U27.1 U27.9 U27.11 U27.18 U28.2 U28.4 U28.5 U28.12 U$13.9 U$13.11
GND7: C92.2 C94.2 C95.2 C96.C C97.1 C98.1 C99.C C101.2 C102.2 C103.2 C104.2 D8.C J8.6 JP72.5 JP72.6 JP73.1 JP78.1 LED8.C Q8.2 S15.1 U29.2 U30.3 U30.5 U30.21 U31.1 U31.9 U31.11 U31.18 U32.2 U32.4 U32.5 U32.12 U$15.9 U$15.11
GND8: C105.2 C107.2 C108.2 C109.C C110.1 C111.1 C112.C C114.2 C115.2 C116.2 C117.2 D9.C J9.6 JP82.5 JP82.6 JP83.1 JP88.1 LED9.C Q9.2 S17.1 U33.2 U34.3 U34.5 U34.21 U35.1 U35.9 U35.11 U35.18 U36.2 U36.4 U36.5 U36.12 U$17.9 U$17.11
GND9: C118.2 C120.2 C121.2 C122.C C123.1 C124.1 C125.C C127.2 C128.2 C129.2 C130.2 D10.C J10.6 JP92.5 JP92.6 JP93.1 JP98.1 LED10.C Q10.2 S19.1 U37.2 U38.3 U38.5 U38.21 U39.1 U39.9 U39.11 U39.18 U40.2 U40.4 U40.5 U40.12 U$19.9 U$19.11
GND10: C131.2 C133.2 C134.2 C135.C C136.1 C137.1 C138.C C140.2 C141.2 C142.2 C143.2 D11.C J11.6 JP102.5 JP102.6 JP103.1 JP108.1 LED11.C Q11.2 S21.1 U41.2 U42.3 U42.5 U42.21 U43.1 U43.9 U43.11 U43.18 U44.2 U44.4 U44.5 U44.12 U$21.9 U$21.11
GND11: C144.2 C146.2 C147.2 C148.C C149.1 C150.1 C151.C C153.2 C154.2 C155.2 C156.2 D12.C J12.6 JP112.5 JP112.6 JP113.1 JP118.1 LED12.C Q12.2 S23.1 U45.2 U46.3 U46.5 U46.21 U47.1 U47.9 U47.11 U47.18 U48.2 U48.4 U48.5 U48.12 U$23.9 U$23.11
MISO: J1.1 U6.16
MISO1: J2.1 U4.16
MISO2: J3.1 U10.16
MISO3: J4.1 U14.16
MISO4: J5.1 U18.16
MISO5: J6.1 U22.16
MISO6: J7.1 U26.16
MISO7: J8.1 U30.16
MISO8: J9.1 U34.16
MISO9: J10.1 U38.16
MISO10: J11.1 U42.16
MISO11: J12.1 U46.16
MOSI: J1.4 U6.15
MOSI1: J2.4 U4.15
MOSI2: J3.4 U10.15
MOSI3: J4.4 U14.15
MOSI4: J5.4 U18.15
MOSI5: J6.4 U22.15
MOSI6: J7.4 U26.15
MOSI7: J8.4 U30.15
MOSI8: J9.4 U34.15
MOSI9: J10.4 U38.15
MOSI10: J11.4 U42.15
MOSI11: J12.4 U46.15
N$1: C18.2 U$1.8
N$2: C18.1 U$1.12
N$3: C1.1 U1.10
N$4: C2.1 U1.20
N$5: LED2.A R3.1
N$6: C21.1 U$1.10
N$7: D1.A R5.2
N$8: Q2.1 U4.8
N$9: Q2.3 U4.7
N$10: JP13.2 JP18.2 S4.2 S4.5
N$11: C15.1 U7.10
N$12: D3.A R12.2
N$13: Q1.1 U6.8
N$14: Q1.3 U6.7
N$15: JP1.2 JP10.2 S2.2 S2.5
N$16: C16.1 U7.20
N$17: C5.2 U$2.8
N$18: C5.1 U$2.12
N$19: C6.1 U$2.10
N$20: LED3.A R8.1
N$21: D2.A R13.2
N$22: Q3.1 U10.8
N$23: Q3.3 U10.7
N$24: JP23.2 JP28.2 S6.2 S6.5
N$25: C37.1 U11.10
N$26: C38.1 U11.20
N$27: C20.2 U$5.8
N$28: C20.1 U$5.12
N$29: C28.1 U$5.10
N$30: LED4.A R16.1
N$31: D4.A R18.2
N$32: Q4.1 U14.8
N$33: Q4.3 U14.7
N$34: JP33.2 JP38.2 S8.2 S8.5
N$35: C50.1 U15.10
N$36: C51.1 U15.20
N$37: C41.2 U$7.8
N$38: LED1.A R11.1
N$39: C41.1 U$7.12
N$40: C42.1 U$7.10
N$41: LED5.A R21.1
N$42: D5.A R23.2
N$43: Q5.1 U18.8
N$44: Q5.3 U18.7
N$45: JP43.2 JP48.2 S10.2 S10.5
N$46: C63.1 U19.10
N$47: C64.1 U19.20
N$48: C54.2 U$9.8
N$49: C54.1 U$9.12
N$50: C55.1 U$9.10
N$51: LED6.A R26.1
N$52: D6.A R28.2
N$53: Q6.1 U22.8
N$54: Q6.3 U22.7
N$55: JP53.2 JP58.2 S12.2 S12.5
N$56: C76.1 U23.10
N$57: C77.1 U23.20
N$58: C67.2 U$11.8
N$59: C67.1 U$11.12
N$60: C68.1 U$11.10
N$61: LED7.A R31.1
N$62: D7.A R33.2
N$63: Q7.1 U26.8
N$64: Q7.3 U26.7
N$65: JP63.2 JP68.2 S14.2 S14.5
N$66: C89.1 U27.10
N$67: C90.1 U27.20
N$68: C80.2 U$13.8
N$69: C80.1 U$13.12
N$70: C81.1 U$13.10
N$71: LED8.A R36.1
N$72: D8.A R38.2
N$73: Q8.1 U30.8
N$74: Q8.3 U30.7
N$75: JP73.2 JP78.2 S16.2 S16.5
N$76: C102.1 U31.10
N$77: C103.1 U31.20
N$78: C93.2 U$15.8
N$79: C93.1 U$15.12
N$80: C94.1 U$15.10
N$81: LED9.A R41.1
N$82: D9.A R43.2
N$83: Q9.1 U34.8
N$84: Q9.3 U34.7
N$85: JP83.2 JP88.2 S18.2 S18.5
N$86: C115.1 U35.10
N$87: C116.1 U35.20
N$88: C106.2 U$17.8
N$89: C106.1 U$17.12
N$90: C107.1 U$17.10
N$91: LED10.A R46.1
N$92: D10.A R48.2
N$93: Q10.1 U38.8
N$94: Q10.3 U38.7
N$95: JP93.2 JP98.2 S20.2 S20.5
N$96: C128.1 U39.10
N$97: C129.1 U39.20
N$98: C119.2 U$19.8
N$99: C119.1 U$19.12
N$100: C120.1 U$19.10
N$101: LED11.A R51.1
N$102: D11.A R53.2
N$103: Q11.1 U42.8
N$104: Q11.3 U42.7
N$105: JP103.2 JP108.2 S22.2 S22.5
N$106: C141.1 U43.10
N$107: C142.1 U43.20
N$108: C132.2 U$21.8
N$109: C132.1 U$21.12
N$110: C133.1 U$21.10
N$111: LED12.A R56.1
N$112: D12.A R58.2
N$113: Q12.1 U46.8
N$114: Q12.3 U46.7
N$115: JP113.2 JP118.2 S24.2 S24.5
N$116: C154.1 U47.10
N$117: C155.1 U47.20
N$118: C145.2 U$23.8
N$119: C145.1 U$23.12
N$120: C146.1 U$23.10
RAW [vcc]: C26.A S2.1 S2.4 U5.1 U5.3
RAW1 [vcc]: C11.A S4.1 S4.4 U3.1 U3.3
RAW2 [vcc]: C34.A S6.1 S6.4 U9.1 U9.3
RAW3 [vcc]: C47.A S8.1 S8.4 U13.1 U13.3
RAW4 [vcc]: C60.A S10.1 S10.4 U17.1 U17.3
RAW5 [vcc]: C73.A S12.1 S12.4 U21.1 U21.3
RAW6 [vcc]: C86.A S14.1 S14.4 U25.1 U25.3
RAW7 [vcc]: C99.A S16.1 S16.4 U29.1 U29.3
RAW8 [vcc]: C112.A S18.1 S18.4 U33.1 U33.3
RAW9 [vcc]: C125.A S20.1 S20.4 U37.1 U37.3
RAW10 [vcc]: C138.A S22.1 S22.4 U41.1 U41.3
RAW11 [vcc]: C151.A S24.1 S24.4 U45.1 U45.3
RESET: C27.1 J1.5 R10.1 S1.3 U6.29
RESET1: C12.1 J2.5 R4.1 S3.3 U4.29
RESET2: C35.1 J3.5 R9.1 S5.3 U10.29
RESET3: C48.1 J4.5 R17.1 S7.3 U14.29
RESET4: C61.1 J5.5 R22.1 S9.3 U18.29
RESET5: C74.1 J6.5 R27.1 S11.3 U22.29
RESET6: C87.1 J7.5 R32.1 S13.3 U26.29
RESET7: C100.1 J8.5 R37.1 S15.3 U30.29
RESET8: C113.1 J9.5 R42.1 S17.3 U34.29
RESET9: C126.1 J10.5 R47.1 S19.3 U38.29
RESET10: C139.1 J11.5 R52.1 S21.3 U42.29
RESET11: C152.1 J12.5 R57.1 S23.3 U46.29
RXI: JP7.3 U6.30
RXI1: JP9.3 U4.30
RXI2: JP22.3 U10.30
RXI3: JP32.3 U14.30
RXI4: JP42.3 U18.30
RXI5: JP52.3 U22.30
RXI6: JP62.3 U26.30
RXI7: JP72.3 U30.30
RXI8: JP82.3 U34.30
RXI9: JP92.3 U38.30
RXI10: JP102.3 U42.30
RXI11: JP112.3 U46.30
SCK: J1.3 R12.1 U6.17
SCK1: J2.3 R5.1 U4.17
SCK2: J3.3 R13.1 U10.17
SCK3: J4.3 R18.1 U14.17
SCK4: J5.3 R23.1 U18.17
SCK5: J6.3 R28.1 U22.17
SCK6: J7.3 R33.1 U26.17
SCK7: J8.3 R38.1 U30.17
SCK8: J9.3 R43.1 U34.17
SCK9: J10.3 R48.1 U38.17
SCK10: J11.3 R53.1 U42.17
SCK11: J12.3 R58.1 U46.17
SCL: R2.1 U1.23 U2.14 U6.28 U$1.1
SCL1: R7.1 U4.28 U7.23 U8.14 U$2.1
SCL2: R15.1 U10.28 U11.23 U12.14 U$5.1
SCL3: R20.1 U14.28 U15.23 U16.14 U$7.1
SCL4: R25.1 U18.28 U19.23 U20.14 U$9.1
SCL5: R30.1 U22.28 U23.23 U24.14 U$11.1
SCL6: R35.1 U26.28 U27.23 U28.14 U$13.1
SCL7: R40.1 U30.28 U31.23 U32.14 U$15.1
SCL8: R45.1 U34.28 U35.23 U36.14 U$17.1
SCL9: R50.1 U38.28 U39.23 U40.14 U$19.1
SCL10: R55.1 U42.28 U43.23 U44.14 U$21.1
SCL11: R60.1 U46.28 U47.23 U48.14 U$23.1
SDA: R1.1 U1.24 U2.13 U6.27 U$1.16
SDA1: R6.1 U4.27 U7.24 U8.13 U$2.16
SDA2: R14.1 U10.27 U11.24 U12.13 U$5.16
SDA3: R19.1 U14.27 U15.24 U16.13 U$7.16
SDA4: R24.1 U18.27 U19.24 U20.13 U$9.16
SDA5: R29.1 U22.27 U23.24 U24.13 U$11.16
SDA6: R34.1 U26.27 U27.24 U28.13 U$13.16
SDA7: R39.1 U30.27 U31.24 U32.13 U$15.16
SDA8: R44.1 U34.27 U35.24 U36.13 U$17.16
SDA9: R49.1 U38.27 U39.24 U40.13 U$19.16
SDA10: R54.1 U42.27 U43.24 U44.13 U$21.16
SDA11: R59.1 U46.27 U47.24 U48.13 U$23.16
TXO: JP7.2 U6.31
TXO1: JP9.2 U4.31
TXO2: JP22.2 U10.31
TXO3: JP32.2 U14.31
TXO4: JP42.2 U18.31
TXO5: JP52.2 U22.31
TXO6: JP62.2 U26.31
TXO7: JP72.2 U30.31
TXO8: JP82.2 U34.31
TXO9: JP92.2 U38.31
TXO10: JP102.2 U42.31
TXO11: JP112.2 U46.31

## Tracks (layer width: path | path; a pad name or v marks a point on that pad's centre or on a via)
3.3V  (via drill 0.51)
  Top 0.254: 11.94,24.1 U6.18 18.29,24.1 | 29.72,22.73 U2.7 | 29.72,22.73 C29.1 R10.2 33.11,23.79 33.95,22.95 | 29.72,22.73 27.81,22.73 26.63,21.55 C24.2 25.76,21.7 U6.4 18.69,21.7 18.29,22.1 18.29,24.1 | U2.1 32.8,17.56 v33.53,18.29 33.95,18.71 R11.2 C22.1 | U5.5 37.02,26.99 C23.A 34.67,23.67 33.95,22.95 | U$1.2 14.22,12.19 | 10.67,14.48 10.67,12.83 11.31,12.19 13.37,12.19 | 10.67,14.48 10.67,19.56 | C22.1 33.95,22.95 | U2.6 31.72,21.56 32.26,22.1 C22.1 | U$1.13 17.77,13.96 v18.71,14.9 21.68,14.9 22.95,13.63 R1.2 24.42,13.63 v25.02,14.22 26.54,14.22 | 13.37,12.19 C13.1 | 13.37,12.19 14.22,12.19 | U$1.4 14.59,11.19 14.22,11.56 14.22,12.19 | C3.1 v28.45,8.13 28.42,8.16 U1.13 | R2.2 26.76,14.44 26.54,14.22 | U1.8 26.91,12.71 26.8,12.83 26.8,13.97 26.54,14.22 | U6.6 20.9,23.3 20.1,24.1 18.29,24.1 | v13.21,14.48 10.67,14.48 | JP7.4 10.67,19.56 | v11.94,25.91 11.94,24.1 | 11.94,24.1 11.94,20.83 10.67,19.56
  Bottom 0.254: v11.94,25.91 11.94,32.26 13.21,33.53 J1.2 | v18.71,14.9 13.63,14.9 v13.21,14.48 | v28.45,8.13 24.64,11.94 24.64,13.84 v25.02,14.22
3.3V1  (via drill 0.51)
  Top 0.254: 53.09,24.1 U4.18 59.44,24.1 | 70.87,22.73 U8.7 | 70.87,22.73 C14.1 R4.2 74.26,23.79 75.1,22.95 | 70.87,22.73 68.96,22.73 67.78,21.55 C9.2 66.91,21.7 U4.4 59.84,21.7 59.44,22.1 59.44,24.1 | U8.1 73.95,17.56 v74.68,18.29 75.1,18.71 R3.2 C7.1 | U3.5 78.17,26.99 C8.A 75.82,23.67 75.1,22.95 | U$2.2 55.37,12.19 | 51.82,14.48 51.82,12.83 52.45,12.19 54.52,12.19 | 51.82,14.48 51.82,19.56 | C7.1 75.1,22.95 | U8.6 72.87,21.56 73.41,22.1 C7.1 | U$2.13 58.92,13.96 v59.86,14.9 62.83,14.9 64.1,13.63 R6.2 65.57,13.63 v66.17,14.22 67.69,14.22 | 54.52,12.19 C4.1 | 54.52,12.19 55.37,12.19 | U$2.4 55.74,11.19 55.37,11.56 55.37,12.19 | C17.1 v69.6,8.13 69.56,8.16 U7.13 | R7.2 67.91,14.44 67.69,14.22 | U7.8 68.06,12.71 67.94,12.83 67.94,13.97 67.69,14.22 | U4.6 62.05,23.3 61.25,24.1 59.44,24.1 | v54.36,14.48 51.82,14.48 | JP9.4 51.82,19.56 | v53.09,25.91 53.09,24.1 | 53.09,24.1 53.09,20.83 51.82,19.56
  Bottom 0.254: v53.09,25.91 53.09,32.26 54.36,33.53 J2.2 | v59.86,14.9 54.78,14.9 v54.36,14.48 | v69.6,8.13 65.79,11.94 65.79,13.84 v66.17,14.22
3.3V2  (via drill 0.51)
  Top 0.254: 94.23,24.1 U10.18 100.58,24.1 | 112.01,22.73 U12.7 | 112.01,22.73 C36.1 R9.2 115.4,23.79 116.24,22.95 | 112.01,22.73 110.11,22.73 108.93,21.55 C32.2 108.06,21.7 U10.4 100.98,21.7 100.58,22.1 100.58,24.1 | U12.1 115.09,17.56 v115.82,18.29 116.24,18.71 R8.2 C30.1 | U9.5 119.31,26.99 C31.A 116.96,23.67 116.24,22.95 | U$5.2 96.52,12.19 | 92.96,14.48 92.96,12.83 93.6,12.19 95.67,12.19 | 92.96,14.48 92.96,19.56 | C30.1 116.24,22.95 | U12.6 114.01,21.56 114.55,22.1 C30.1 | U$5.13 100.06,13.96 v101,14.9 103.97,14.9 105.24,13.63 R14.2 106.72,13.63 v107.31,14.22 108.84,14.22 | 95.67,12.19 C19.1 | 95.67,12.19 96.52,12.19 | U$5.4 96.89,11.19 96.52,11.56 96.52,12.19 | C39.1 v110.74,8.13 110.71,8.16 U11.13 | R15.2 109.05,14.44 108.84,14.22 | U11.8 109.21,12.71 109.09,12.83 109.09,13.97 108.84,14.22 | U10.6 103.19,23.3 102.39,24.1 100.58,24.1 | v95.5,14.48 92.96,14.48 | JP22.4 92.96,19.56 | v94.23,25.91 94.23,24.1 | 94.23,24.1 94.23,20.83 92.96,19.56
  Bottom 0.254: v94.23,25.91 94.23,32.26 95.5,33.53 J3.2 | v101,14.9 95.92,14.9 v95.5,14.48 | v110.74,8.13 106.93,11.94 106.93,13.84 v107.31,14.22
3.3V3  (via drill 0.51)
  Top 0.254: 11.94,52.55 U14.18 18.29,52.55 | 29.72,51.18 U16.7 | 29.72,51.18 C49.1 R17.2 33.11,52.24 33.95,51.4 | 29.72,51.18 27.81,51.18 26.63,50 C45.2 25.76,50.15 U14.4 18.69,50.15 18.29,50.55 18.29,52.55 | U16.1 32.8,46.01 v33.53,46.74 33.95,47.16 R16.2 C43.1 | U13.5 37.02,55.44 C44.A 34.67,52.12 33.95,51.4 | U$7.2 14.22,40.64 | 10.67,42.93 10.67,41.27 11.31,40.64 13.37,40.64 | 10.67,42.93 10.67,48.01 | C43.1 33.95,51.4 | U16.6 31.72,50.01 32.26,50.55 C43.1 | U$7.13 17.77,42.41 v18.71,43.35 21.68,43.35 22.95,42.08 R19.2 24.42,42.08 v25.02,42.67 26.54,42.67 | 13.37,40.64 C40.1 | 13.37,40.64 14.22,40.64 | U$7.4 14.59,39.64 14.22,40.01 14.22,40.64 | C52.1 v28.45,36.58 28.42,36.61 U15.13 | R20.2 26.76,42.89 26.54,42.67 | U15.8 26.91,41.16 26.8,41.27 26.8,42.42 26.54,42.67 | U14.6 20.9,51.75 20.1,52.55 18.29,52.55 | v13.21,42.93 10.67,42.93 | JP32.4 10.67,48.01 | v11.94,54.36 11.94,52.55 | 11.94,52.55 11.94,49.28 10.67,48.01
  Bottom 0.254: v11.94,54.36 11.94,60.71 13.21,61.98 J4.2 | v18.71,43.35 13.63,43.35 v13.21,42.93 | v28.45,36.58 24.64,40.39 24.64,42.29 v25.02,42.67
3.3V4  (via drill 0.51)
  Top 0.254: 53.09,52.55 U18.18 59.44,52.55 | 70.87,51.18 U20.7 | 70.87,51.18 C62.1 R22.2 74.26,52.24 75.1,51.4 | 70.87,51.18 68.96,51.18 67.78,50 C58.2 66.91,50.15 U18.4 59.84,50.15 59.44,50.55 59.44,52.55 | U20.1 73.95,46.01 v74.68,46.74 75.1,47.16 R21.2 C56.1 | U17.5 78.17,55.44 C57.A 75.82,52.12 75.1,51.4 | U$9.2 55.37,40.64 | 51.82,42.93 51.82,41.27 52.45,40.64 54.52,40.64 | 51.82,42.93 51.82,48.01 | C56.1 75.1,51.4 | U20.6 72.87,50.01 73.41,50.55 C56.1 | U$9.13 58.92,42.41 v59.86,43.35 62.83,43.35 64.1,42.08 R24.2 65.57,42.08 v66.17,42.67 67.69,42.67 | 54.52,40.64 C53.1 | 54.52,40.64 55.37,40.64 | U$9.4 55.74,39.64 55.37,40.01 55.37,40.64 | C65.1 v69.6,36.58 69.56,36.61 U19.13 | R25.2 67.91,42.89 67.69,42.67 | U19.8 68.06,41.16 67.94,41.27 67.94,42.42 67.69,42.67 | U18.6 62.05,51.75 61.25,52.55 59.44,52.55 | v54.36,42.93 51.82,42.93 | JP42.4 51.82,48.01 | v53.09,54.36 53.09,52.55 | 53.09,52.55 53.09,49.28 51.82,48.01
  Bottom 0.254: v53.09,54.36 53.09,60.71 54.36,61.98 J5.2 | v59.86,43.35 54.78,43.35 v54.36,42.93 | v69.6,36.58 65.79,40.39 65.79,42.29 v66.17,42.67
3.3V5  (via drill 0.51)
  Top 0.254: 94.23,52.55 U22.18 100.58,52.55 | 112.01,51.18 U24.7 | 112.01,51.18 C75.1 R27.2 115.4,52.24 116.24,51.4 | 112.01,51.18 110.11,51.18 108.93,50 C71.2 108.06,50.15 U22.4 100.98,50.15 100.58,50.55 100.58,52.55 | U24.1 115.09,46.01 v115.82,46.74 116.24,47.16 R26.2 C69.1 | U21.5 119.31,55.44 C70.A 116.96,52.12 116.24,51.4 | U$11.2 96.52,40.64 | 92.96,42.93 92.96,41.27 93.6,40.64 95.67,40.64 | 92.96,42.93 92.96,48.01 | C69.1 116.24,51.4 | U24.6 114.01,50.01 114.55,50.55 C69.1 | U$11.13 100.06,42.41 v101,43.35 103.97,43.35 105.24,42.08 R29.2 106.72,42.08 v107.31,42.67 108.84,42.67 | 95.67,40.64 C66.1 | 95.67,40.64 96.52,40.64 | U$11.4 96.89,39.64 96.52,40.01 96.52,40.64 | C78.1 v110.74,36.58 110.71,36.61 U23.13 | R30.2 109.05,42.89 108.84,42.67 | U23.8 109.21,41.16 109.09,41.27 109.09,42.42 108.84,42.67 | U22.6 103.19,51.75 102.39,52.55 100.58,52.55 | v95.5,42.93 92.96,42.93 | JP52.4 92.96,48.01 | v94.23,54.36 94.23,52.55 | 94.23,52.55 94.23,49.28 92.96,48.01
  Bottom 0.254: v94.23,54.36 94.23,60.71 95.5,61.98 J6.2 | v101,43.35 95.92,43.35 v95.5,42.93 | v110.74,36.58 106.93,40.39 106.93,42.29 v107.31,42.67
3.3V6  (via drill 0.51)
  Top 0.254: 11.94,80.99 U26.18 18.29,80.99 | 29.72,79.63 U28.7 | 29.72,79.63 C88.1 R32.2 33.11,80.68 33.95,79.84 | 29.72,79.63 27.81,79.63 26.63,78.45 C84.2 25.76,78.59 U26.4 18.69,78.59 18.29,78.99 18.29,80.99 | U28.1 32.8,74.45 v33.53,75.18 33.95,75.6 R31.2 C82.1 | U25.5 37.02,83.88 C83.A 34.67,80.56 33.95,79.84 | U$13.2 14.22,69.08 | 10.67,71.37 10.67,69.72 11.31,69.08 13.37,69.08 | 10.67,71.37 10.67,76.45 | C82.1 33.95,79.84 | U28.6 31.72,78.45 32.26,78.99 C82.1 | U$13.13 17.77,70.85 v18.71,71.79 21.68,71.79 22.95,70.52 R34.2 24.42,70.52 v25.02,71.12 26.54,71.12 | 13.37,69.08 C79.1 | 13.37,69.08 14.22,69.08 | U$13.4 14.59,68.08 14.22,68.45 14.22,69.08 | C91.1 v28.45,65.02 28.42,65.06 U27.13 | R35.2 26.76,71.33 26.54,71.12 | U27.8 26.91,69.61 26.8,69.72 26.8,70.87 26.54,71.12 | U26.6 20.9,80.19 20.1,80.99 18.29,80.99 | v13.21,71.37 10.67,71.37 | JP62.4 10.67,76.45 | v11.94,82.8 11.94,80.99 | 11.94,80.99 11.94,77.72 10.67,76.45
  Bottom 0.254: v11.94,82.8 11.94,89.15 13.21,90.42 J7.2 | v18.71,71.79 13.63,71.79 v13.21,71.37 | v28.45,65.02 24.64,68.83 24.64,70.74 v25.02,71.12
3.3V7  (via drill 0.51)
  Top 0.254: 53.09,80.99 U30.18 59.44,80.99 | 70.87,79.63 U32.7 | 70.87,79.63 C101.1 R37.2 74.26,80.68 75.1,79.84 | 70.87,79.63 68.96,79.63 67.78,78.45 C97.2 66.91,78.59 U30.4 59.84,78.59 59.44,78.99 59.44,80.99 | U32.1 73.95,74.45 v74.68,75.18 75.1,75.6 R36.2 C95.1 | U29.5 78.17,83.88 C96.A 75.82,80.56 75.1,79.84 | U$15.2 55.37,69.08 | 51.82,71.37 51.82,69.72 52.45,69.08 54.52,69.08 | 51.82,71.37 51.82,76.45 | C95.1 75.1,79.84 | U32.6 72.87,78.45 73.41,78.99 C95.1 | U$15.13 58.92,70.85 v59.86,71.79 62.83,71.79 64.1,70.52 R39.2 65.57,70.52 v66.17,71.12 67.69,71.12 | 54.52,69.08 C92.1 | 54.52,69.08 55.37,69.08 | U$15.4 55.74,68.08 55.37,68.45 55.37,69.08 | C104.1 v69.6,65.02 69.56,65.06 U31.13 | R40.2 67.91,71.33 67.69,71.12 | U31.8 68.06,69.61 67.94,69.72 67.94,70.87 67.69,71.12 | U30.6 62.05,80.19 61.25,80.99 59.44,80.99 | v54.36,71.37 51.82,71.37 | JP72.4 51.82,76.45 | v53.09,82.8 53.09,80.99 | 53.09,80.99 53.09,77.72 51.82,76.45
  Bottom 0.254: v53.09,82.8 53.09,89.15 54.36,90.42 J8.2 | v59.86,71.79 54.78,71.79 v54.36,71.37 | v69.6,65.02 65.79,68.83 65.79,70.74 v66.17,71.12
3.3V8  (via drill 0.51)
  Top 0.254: 94.23,80.99 U34.18 100.58,80.99 | 112.01,79.63 U36.7 | 112.01,79.63 C114.1 R42.2 115.4,80.68 116.24,79.84 | 112.01,79.63 110.11,79.63 108.93,78.45 C110.2 108.06,78.59 U34.4 100.98,78.59 100.58,78.99 100.58,80.99 | U36.1 115.09,74.45 v115.82,75.18 116.24,75.6 R41.2 C108.1 | U33.5 119.31,83.88 C109.A 116.96,80.56 116.24,79.84 | U$17.2 96.52,69.08 | 92.96,71.37 92.96,69.72 93.6,69.08 95.67,69.08 | 92.96,71.37 92.96,76.45 | C108.1 116.24,79.84 | U36.6 114.01,78.45 114.55,78.99 C108.1 | U$17.13 100.06,70.85 v101,71.79 103.97,71.79 105.24,70.52 R44.2 106.72,70.52 v107.31,71.12 108.84,71.12 | 95.67,69.08 C105.1 | 95.67,69.08 96.52,69.08 | U$17.4 96.89,68.08 96.52,68.45 96.52,69.08 | C117.1 v110.74,65.02 110.71,65.06 U35.13 | R45.2 109.05,71.33 108.84,71.12 | U35.8 109.21,69.61 109.09,69.72 109.09,70.87 108.84,71.12 | U34.6 103.19,80.19 102.39,80.99 100.58,80.99 | v95.5,71.37 92.96,71.37 | JP82.4 92.96,76.45 | v94.23,82.8 94.23,80.99 | 94.23,80.99 94.23,77.72 92.96,76.45
  Bottom 0.254: v94.23,82.8 94.23,89.15 95.5,90.42 J9.2 | v101,71.79 95.92,71.79 v95.5,71.37 | v110.74,65.02 106.93,68.83 106.93,70.74 v107.31,71.12
3.3V9  (via drill 0.51)
  Top 0.254: 11.94,109.44 U38.18 18.29,109.44 | 29.72,108.08 U40.7 | 29.72,108.08 C127.1 R47.2 33.11,109.13 33.95,108.29 | 29.72,108.08 27.81,108.08 26.63,106.89 C123.2 25.76,107.04 U38.4 18.69,107.04 18.29,107.44 18.29,109.44 | U40.1 32.8,102.9 v33.53,103.63 33.95,104.05 R46.2 C121.1 | U37.5 37.02,112.33 C122.A 34.67,109.01 33.95,108.29 | U$19.2 14.22,97.53 | 10.67,99.82 10.67,98.17 11.31,97.53 13.37,97.53 | 10.67,99.82 10.67,104.9 | C121.1 33.95,108.29 | U40.6 31.72,106.9 32.26,107.44 C121.1 | U$19.13 17.77,99.3 v18.71,100.24 21.68,100.24 22.95,98.97 R49.2 24.42,98.97 v25.02,99.57 26.54,99.57 | 13.37,97.53 C118.1 | 13.37,97.53 14.22,97.53 | U$19.4 14.59,96.53 14.22,96.9 14.22,97.53 | C130.1 v28.45,93.47 28.42,93.5 U39.13 | R50.2 26.76,99.78 26.54,99.57 | U39.8 26.91,98.06 26.8,98.17 26.8,99.31 26.54,99.57 | U38.6 20.9,108.64 20.1,109.44 18.29,109.44 | v13.21,99.82 10.67,99.82 | JP92.4 10.67,104.9 | v11.94,111.25 11.94,109.44 | 11.94,109.44 11.94,106.17 10.67,104.9
  Bottom 0.254: v11.94,111.25 11.94,117.6 13.21,118.87 J10.2 | v18.71,100.24 13.63,100.24 v13.21,99.82 | v28.45,93.47 24.64,97.28 24.64,99.19 v25.02,99.57
3.3V10  (via drill 0.51)
  Top 0.254: 53.09,109.44 U42.18 59.44,109.44 | 70.87,108.08 U44.7 | 70.87,108.08 C140.1 R52.2 74.26,109.13 75.1,108.29 | 70.87,108.08 68.96,108.08 67.78,106.89 C136.2 66.91,107.04 U42.4 59.84,107.04 59.44,107.44 59.44,109.44 | U44.1 73.95,102.9 v74.68,103.63 75.1,104.05 R51.2 C134.1 | U41.5 78.17,112.33 C135.A 75.82,109.01 75.1,108.29 | U$21.2 55.37,97.53 | 51.82,99.82 51.82,98.17 52.45,97.53 54.52,97.53 | 51.82,99.82 51.82,104.9 | C134.1 75.1,108.29 | U44.6 72.87,106.9 73.41,107.44 C134.1 | U$21.13 58.92,99.3 v59.86,100.24 62.83,100.24 64.1,98.97 R54.2 65.57,98.97 v66.17,99.57 67.69,99.57 | 54.52,97.53 C131.1 | 54.52,97.53 55.37,97.53 | U$21.4 55.74,96.53 55.37,96.9 55.37,97.53 | C143.1 v69.6,93.47 69.56,93.5 U43.13 | R55.2 67.91,99.78 67.69,99.57 | U43.8 68.06,98.06 67.94,98.17 67.94,99.31 67.69,99.57 | U42.6 62.05,108.64 61.25,109.44 59.44,109.44 | v54.36,99.82 51.82,99.82 | JP102.4 51.82,104.9 | v53.09,111.25 53.09,109.44 | 53.09,109.44 53.09,106.17 51.82,104.9